# Altium PCB Main_conection.PcbDoc (part 1 of 3)
Units mm, origin at the board's own origin, x right, y up, seen from the top; angles counter-clockwise.
Board outline 75.25 x 97.25 mm, 4 copper layers (Top Layer, Layer 1, Layer 2, Bottom Layer), stack 1.57 mm thick; 186 components, 91 nets, 471 pads, 242 vias.
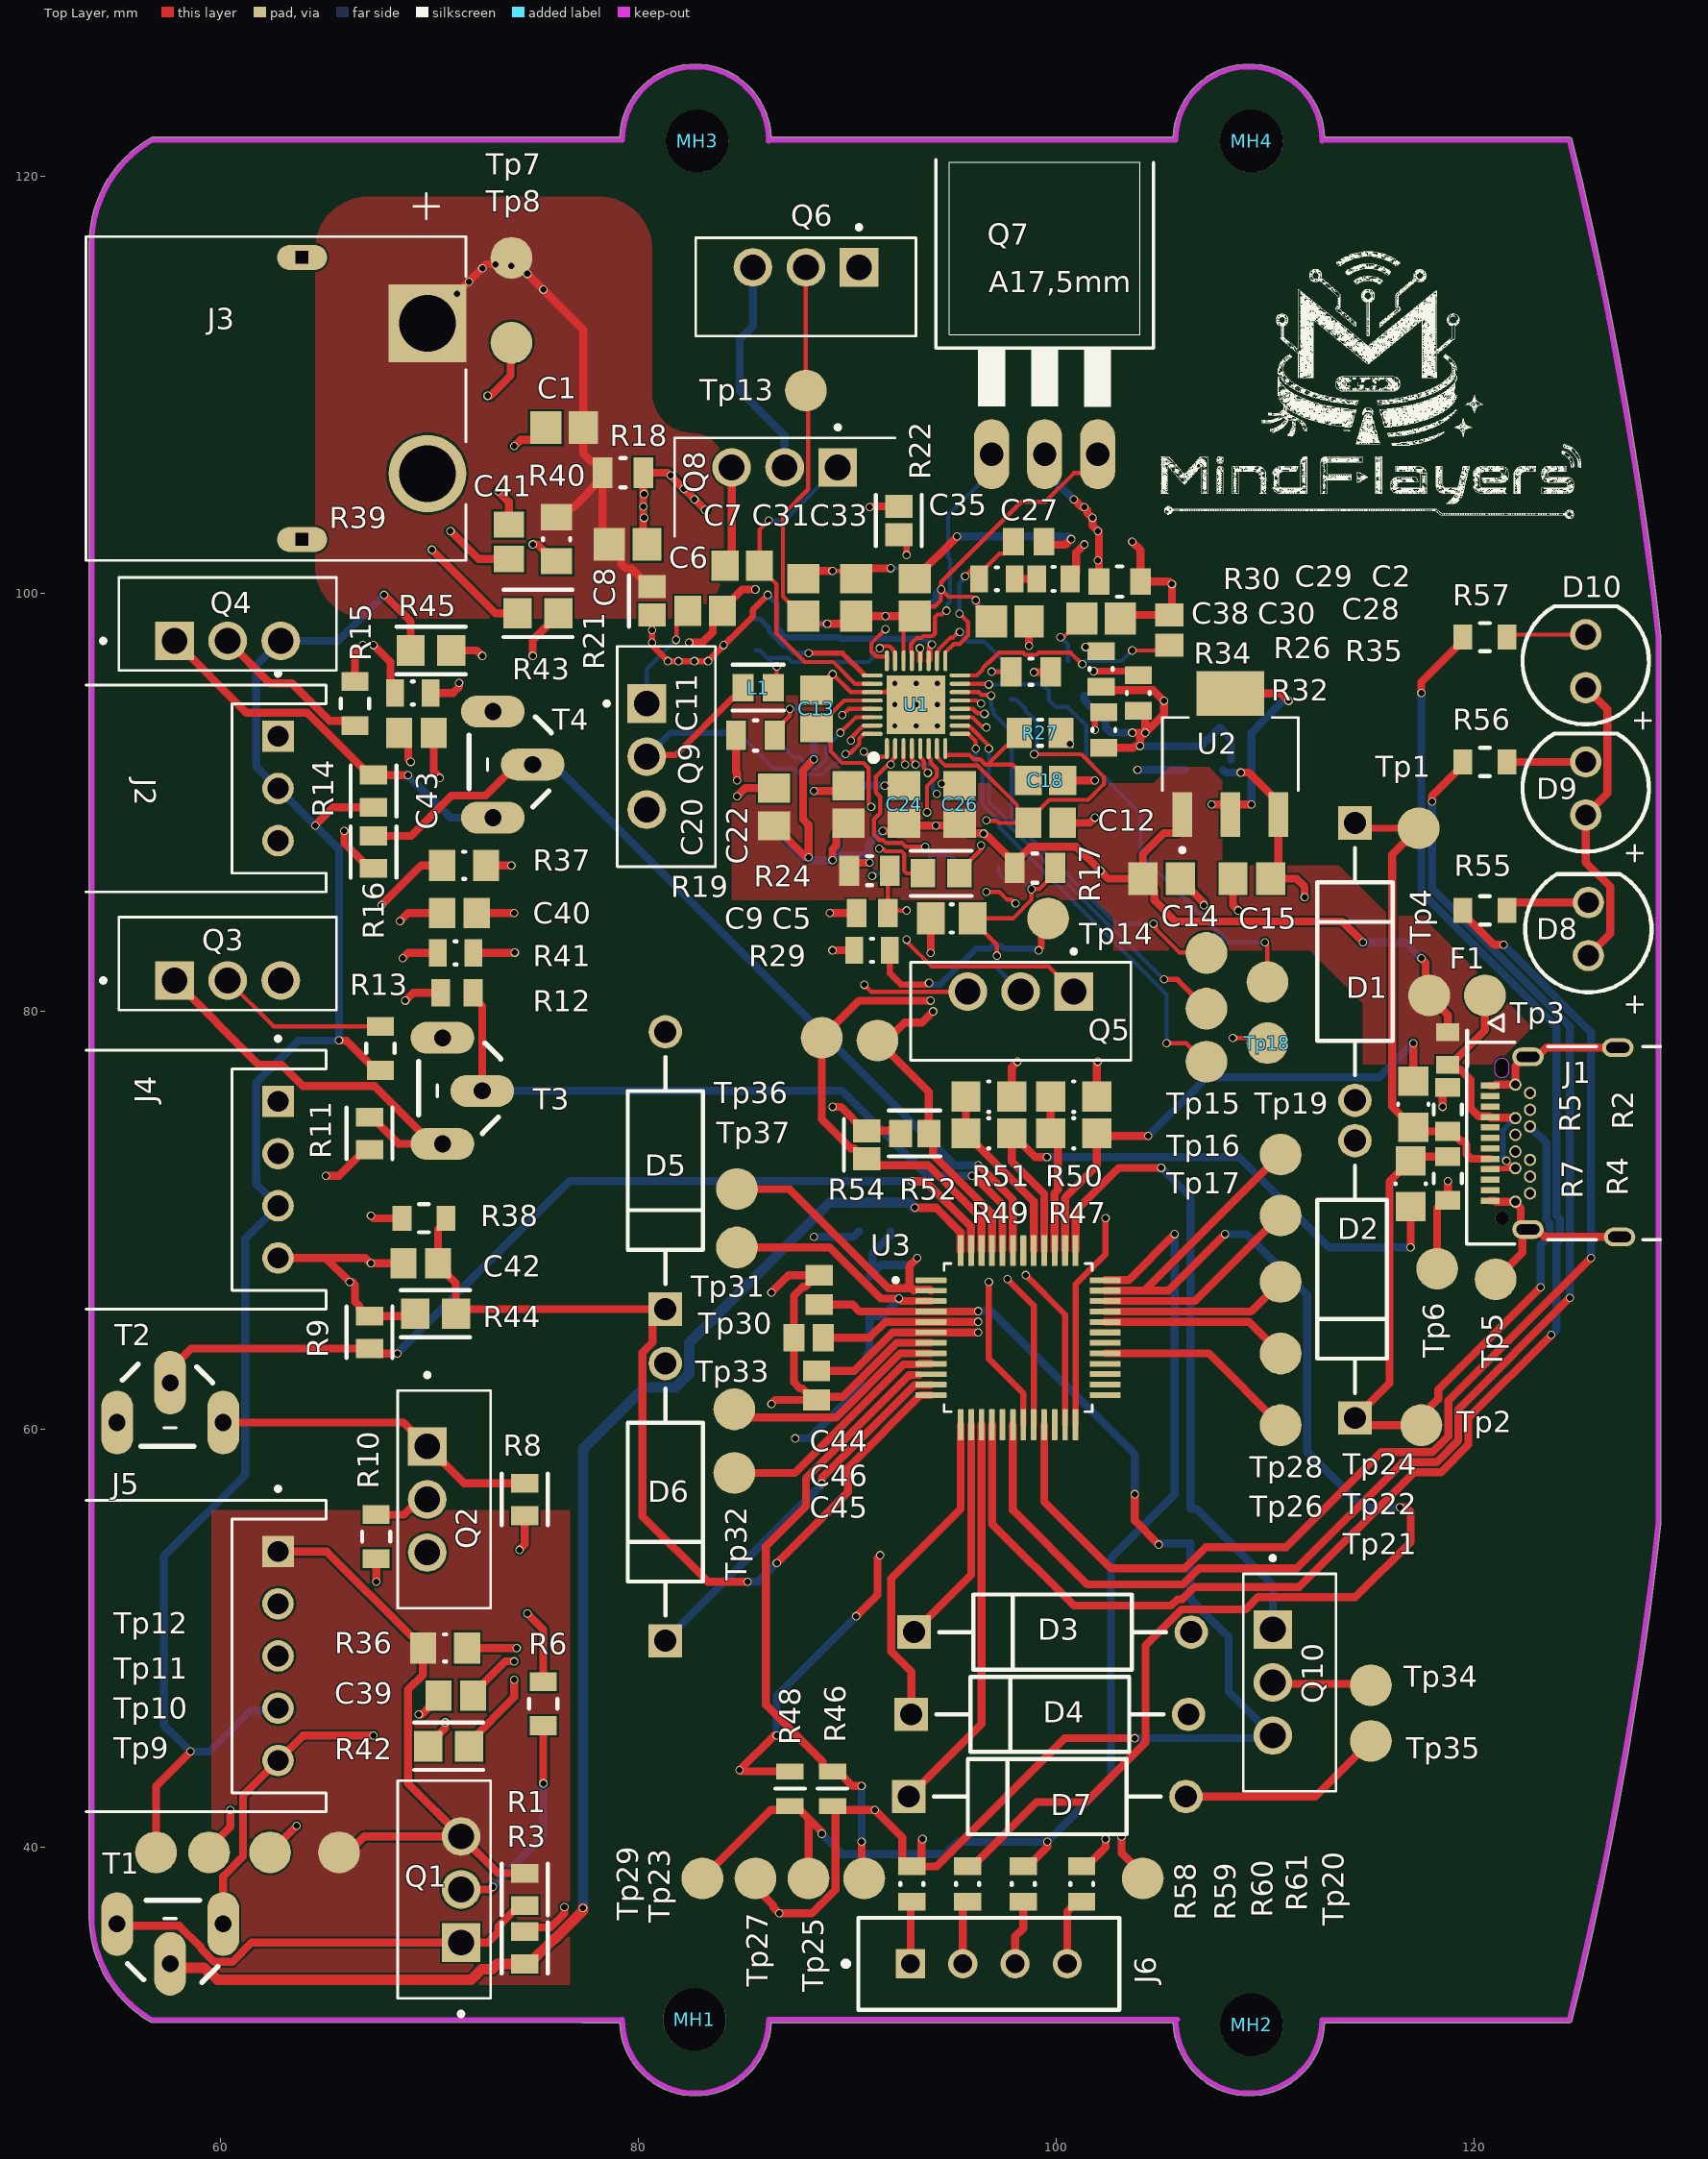
[diagram p0: Top Layer view]
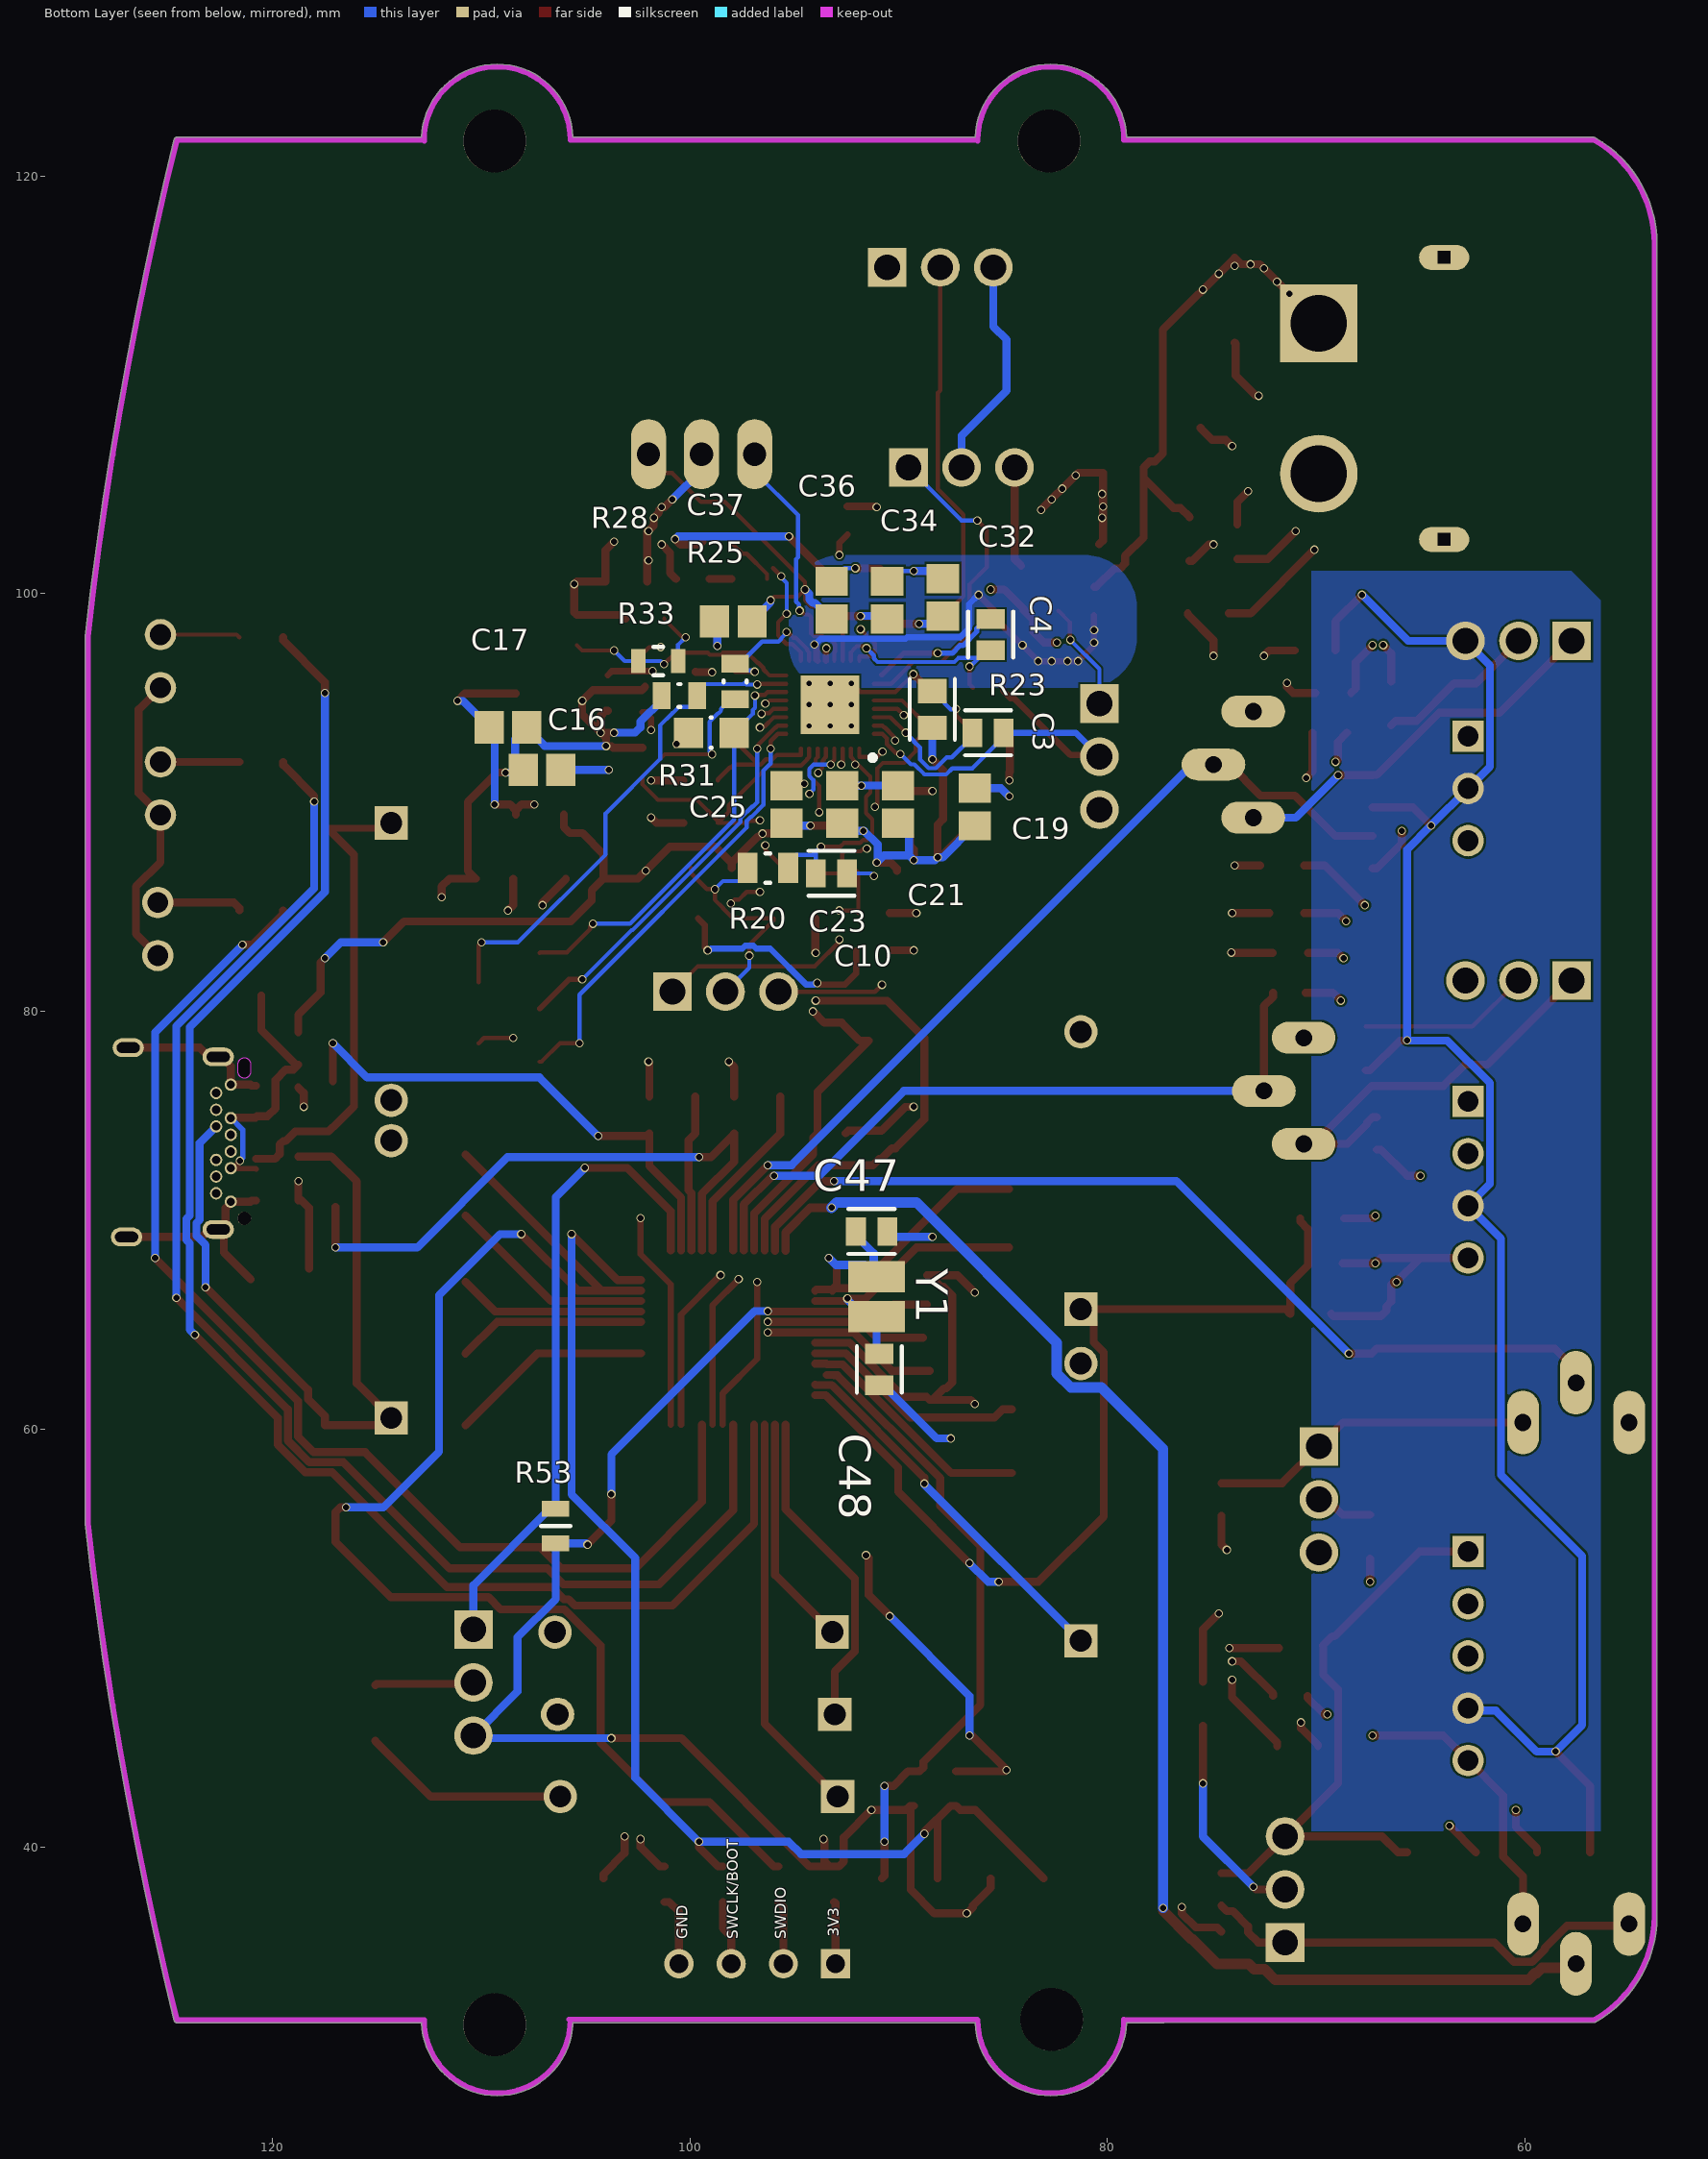
[diagram p1: Bottom Layer view, seen from below]
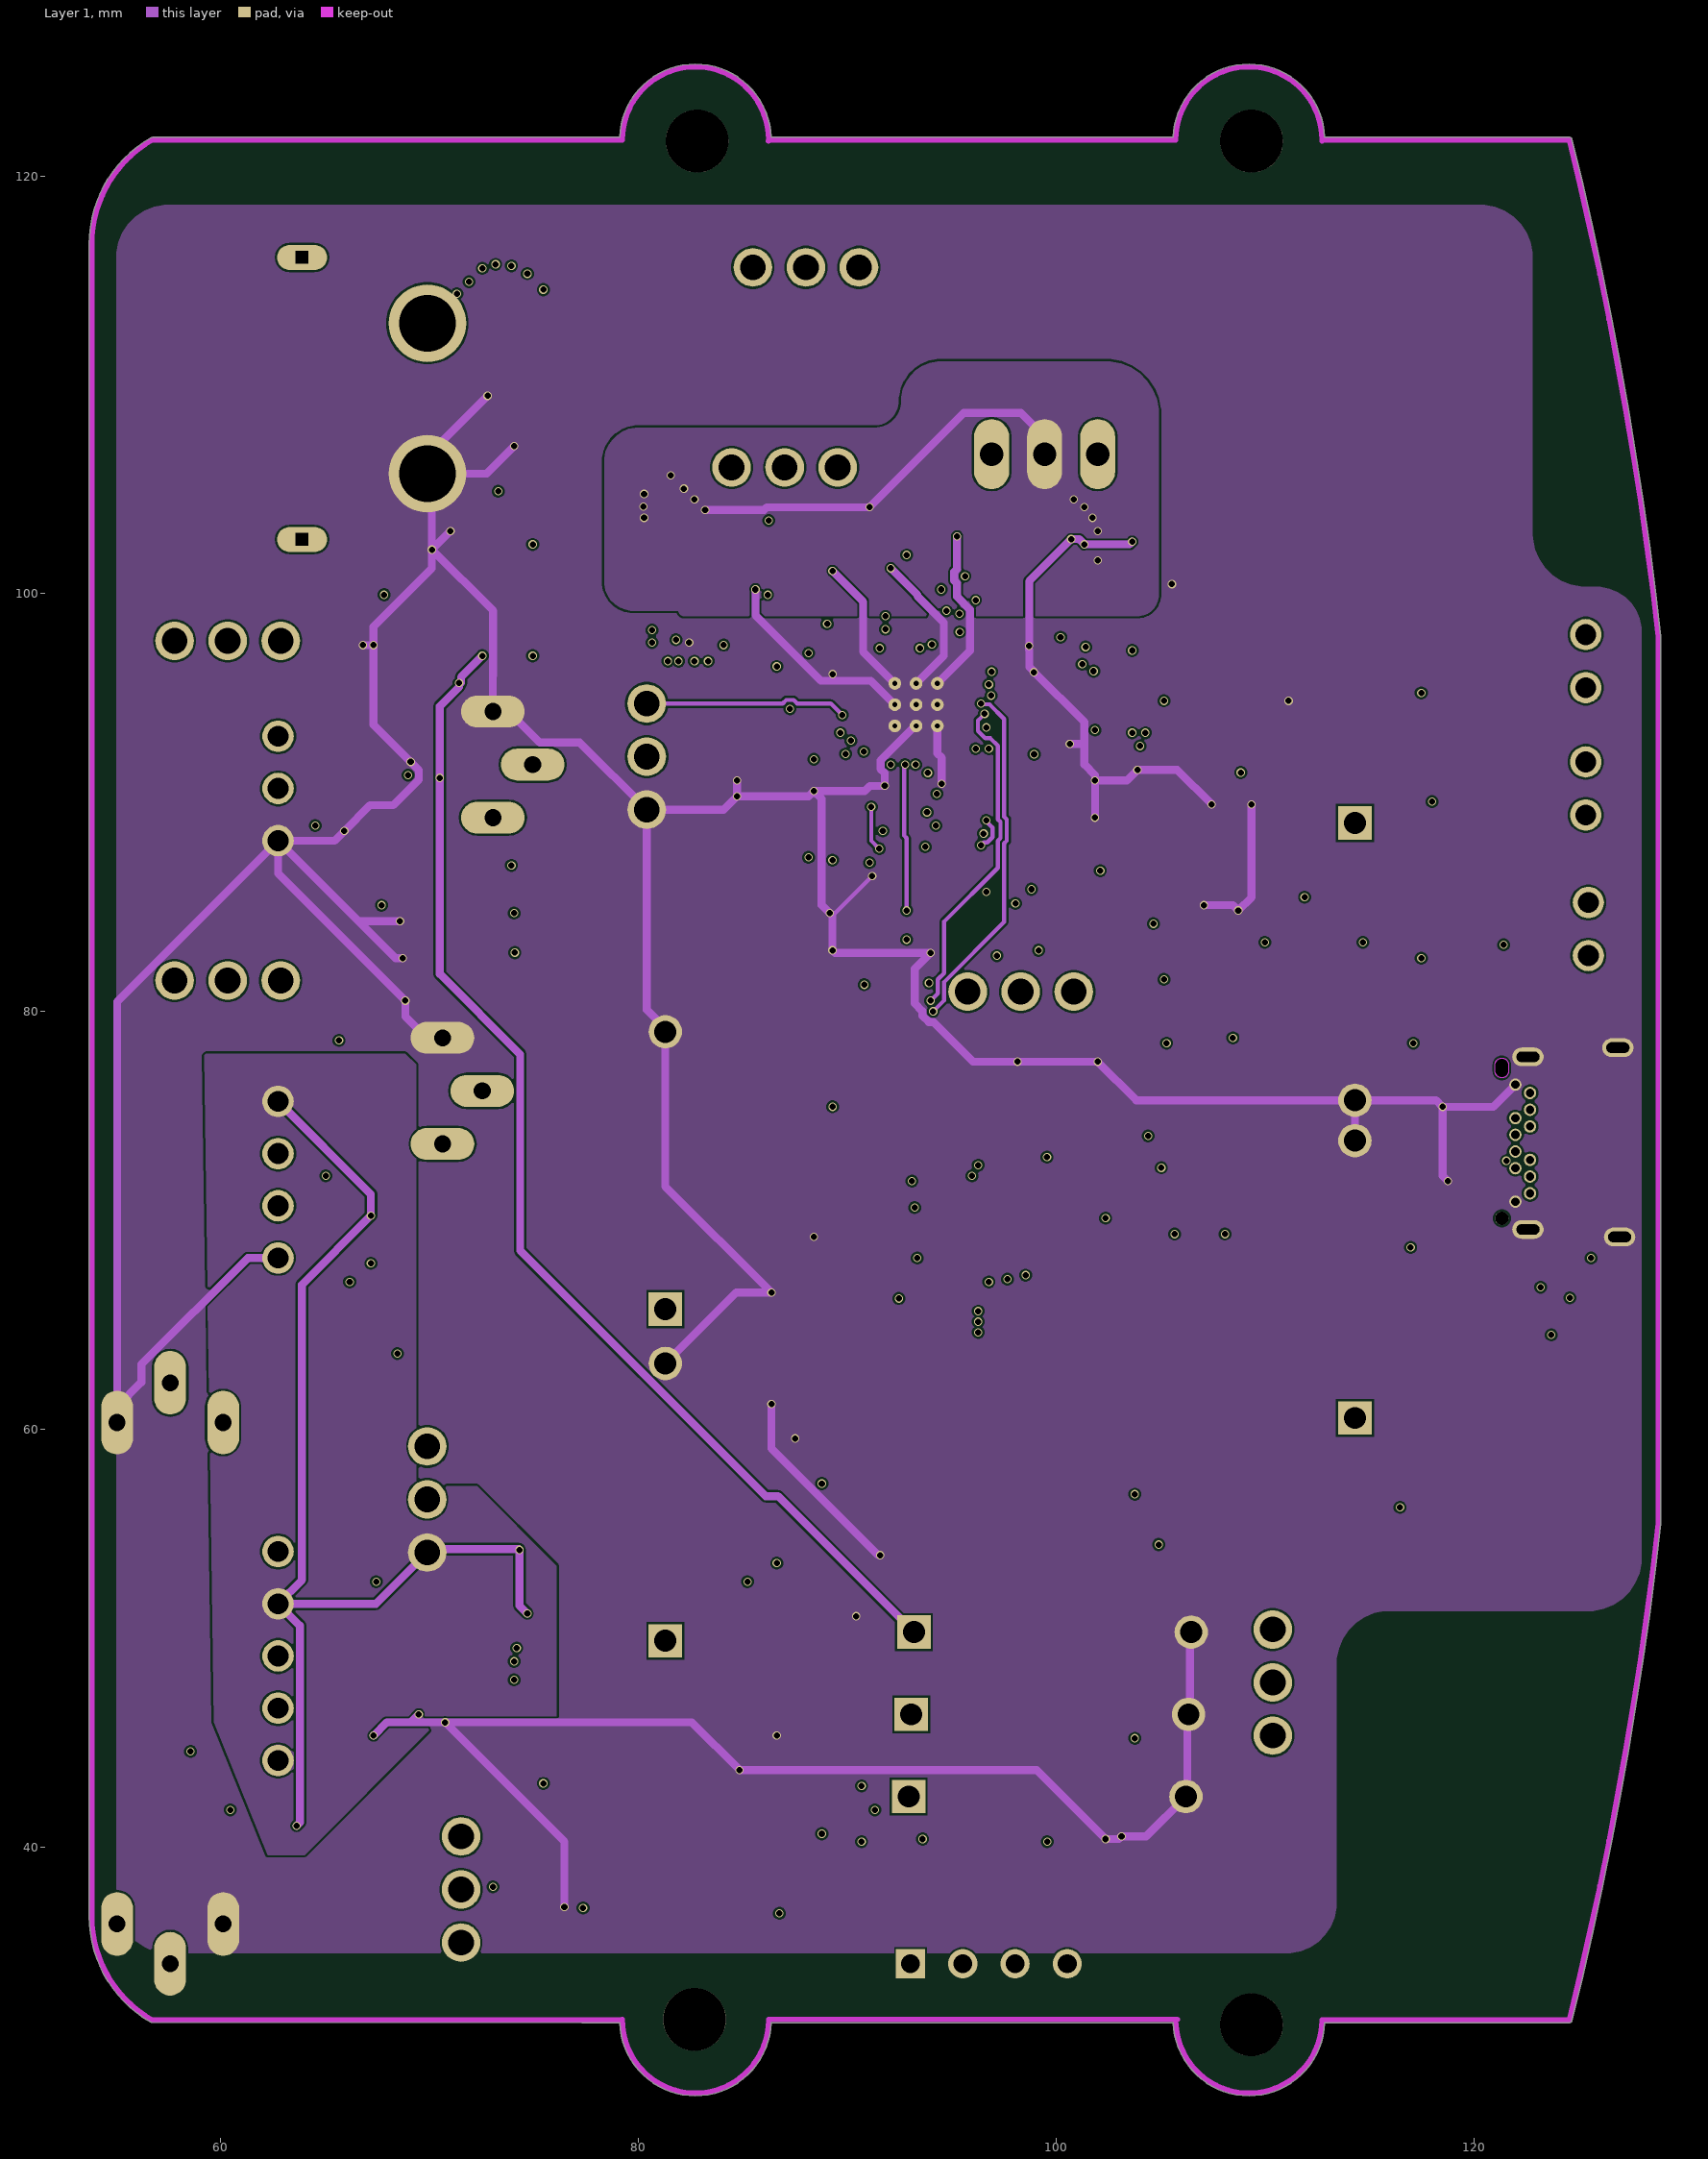
[diagram p2: Layer 1]
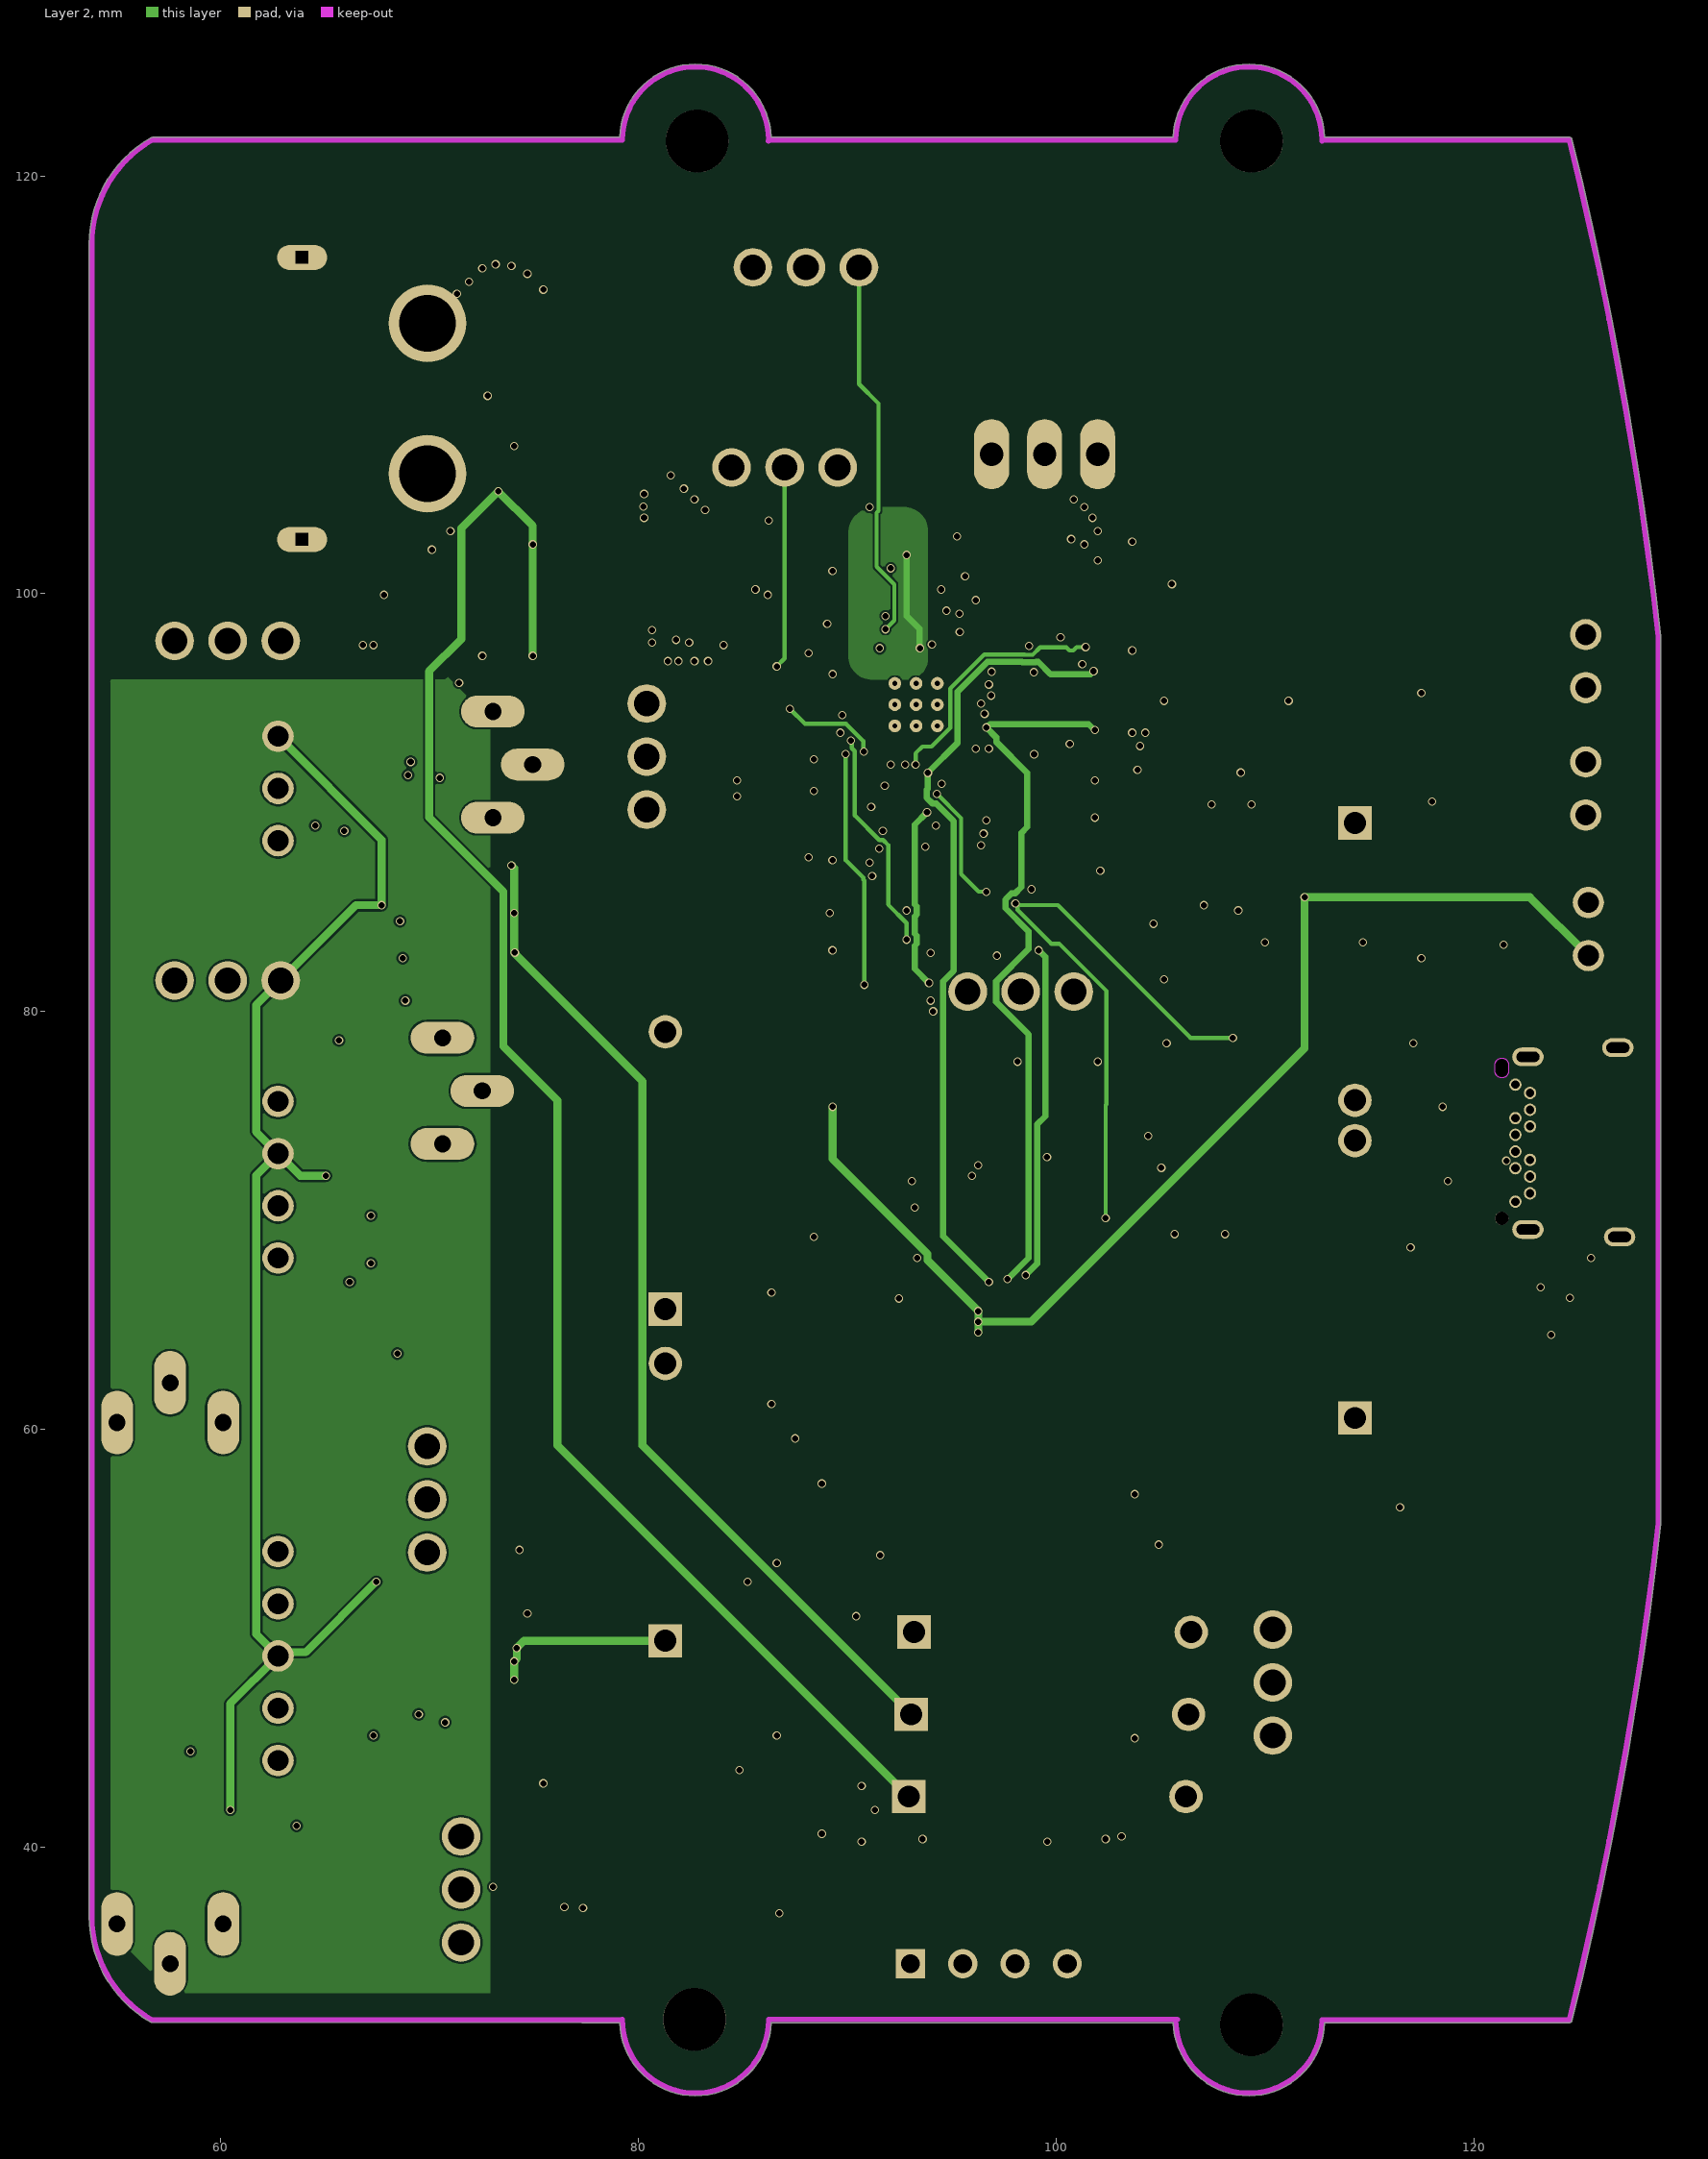
[diagram p3: Layer 2]
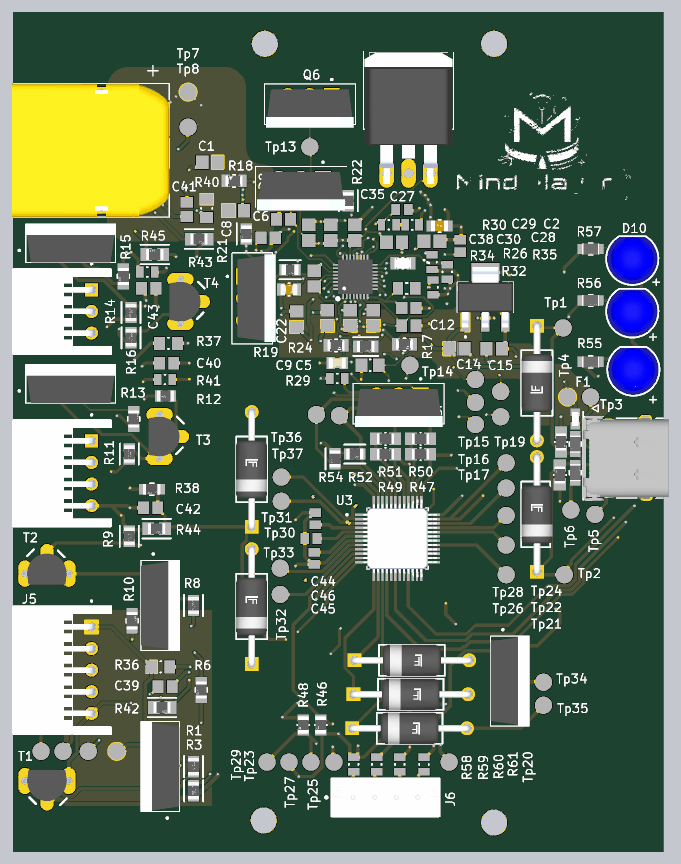
[diagram p5: 3D render of the assembled board from above, using the file's embedded part models]

## Layer stack, top to bottom
Top Solder: solder mask 0.0127, Solder Resist, Dk 3.8
Top Layer: signal copper 0.035
Dielectric 2: prepreg 0.2, 7628, Dk 4.6
Layer 1: signal copper 0.0175
Dielectric 1: dielectric 1.065, FR-4, Dk 4.5
Layer 2: signal copper 0.0175
Dielectric 3: prepreg 0.2, 7628, Dk 4.6
Bottom Layer: signal copper 0.035
Bottom Solder: solder mask 0.0127, Solder Resist, Dk 3.8

## Board outline
56.659,31.612 77.291,31.595 79.096,31.595 ccw(c82.721,31.722) 86.346,31.595 105.596,31.595 ccw(c109.221,31.722) 112.846,31.595 124.565,31.595 ccw(c124.565,31.722) 124.689,31.692 ccw(c-58.279,76.722) 128.948,55.483 128.949,55.498 128.949,97.947 128.948,97.961 ccw(c-58.279,76.722) 124.689,121.753 ccw(c124.565,121.722) 124.565,121.85 112.846,121.85 ccw(c109.221,121.722) 105.596,121.85 86.346,121.85 ccw(c82.721,121.722) 79.096,121.85 77.291,121.85 56.721,121.85 56.658,121.833 ccw(c59.566,116.732) 53.694,116.732 53.694,36.698 ccw(c59.54,36.698)

## Design rules (kind name [scope] priority, off if disabled: settings)
Clearance [All] p1: gap=0.1 ignorepadtopadclearanceinfootprint=FALSE
HoleSize [All] p1: absolutevalues=TRUE maxlimit=6.33 minlimit=0.025 maxpercent=80.000 minpercent=20.000
HoleToHoleClearance [All] p1: gap=0.2 allowstackedmicrovias=TRUE
MinimumSolderMaskSliver [All] p1: minsoldermaskwidth=0.1
PolygonConnect [All] p1: connectstyle=Direct reliefconductorwidth=0.254 reliefentries=4 polygonreliefangle="90 Angle" airgapwidth=0.254
RoutingVias [All] p1: holewidth=0.2 width=0.5 viastyle="Through Hole" minholewidth=0.15 minwidth=0.25 maxholewidth=0.15 maxwidth=0.25
SilkToSilkClearance [All] p1: silktosilkclearance=0.15
SilkToSolderMaskClearance [IsPad] p1: minsilkscreentomaskgap=0.15 clearancetoexposedcopper=TRUE
SolderMaskExpansion [All] p1: expansion=0.102 istentingtop=FALSE
SupplyNets "Schematic Supply Nets_4" [InNet('VBUS')] p1: voltage=0.000
SupplyNets "Schematic Supply Nets_3" [InNet('GND')] p2: voltage=0.000
SupplyNets "Schematic Supply Nets_2" [InNet('3.3V')] p3: voltage=0.000
SupplyNets "Schematic Supply Nets_1" [InNet('BAT')] p4: voltage=0.000
SupplyNets "Schematic Supply Nets" [InNet('VSYS')] p5: voltage=0.000
UnRoutedNet [All] p1: checkbadconnections=TRUE
Width [All] p1: maxlimit=1816.048 minlimit=0.102 preferedwidth=0.102
24 further rules are at their usual default settings.

## Classes and differential pairs
component class Main: MH1 MH2 MH3 MH4
component class U_Power: C1 C2 C3 C4 C5 C6 C7 C8 C9 C10 C11 C12 C13 C14 C15 C16 C17 C18 C19 C20 C21 C22 C23 C24 C25 C26 C27 C28 C29 C30 C31 C32 C33 C34 C35 C36 C37 C38 L1 Q5 Q6 Q7 Q8 Q9 R17 R18 R19 R20 R21 R22 R23 R24 R25 R26 R27 R28 R29 R30 R31 R32 R33 R34 R35 Tp13 Tp14 Tp15 Tp16 Tp17 Tp18 Tp19 U1 U2
component class U_Microcontroller: C39 C40 C41 C42 C43 C44 C45 C46 C47 C48 D3 D4 D5 D6 D7 D8 D9 D10 J6 Q10 R36 R37 R38 R39 R40 R41 R42 R43 R44 R45 R46 R47 R48 R49 R50 R51 R52 R53 R54 R55 R56 R57 R58 R59 R60 R61 Tp20 Tp21 Tp22 Tp23 Tp24 Tp25 Tp26 Tp27 Tp28 Tp29 Tp30 Tp31 Tp32 Tp33 Tp34 Tp35 Tp36 Tp37 U3 Y1
component class U_Connectors_U_B: D1 D2 F1 J1 J2 J3 J4 J5 Q1 Q2 Q3 Q4 R1 R2 R3 R4 R5 R6 R7 R8 R9 R10 R11 R12 R13 R14 R15 R16 T1 T2 T3 T4 Tp1 Tp2 Tp3 Tp4 Tp5 Tp6 Tp7 Tp8 Tp9 Tp10 Tp11 Tp12

## Components (designator, comment, footprint, x,y, rotation, side; value= is the part's Value field where it differs from the comment)
C1 "10uf 0805" CAPC2013X140X50ML20T25#1 76.454,107.95 r0 top
C2 "1uf 0805" FP-0805-L_2_01_0_2-W_1_25-MFG 103.038,100.584 r0 top
C3 "47nf 0805" FP-C0805C-DN-MFG 85.725,93.345 r0 bottom value="47,000 pF"
C4 "47nf 0805" FP-C0805C-DN-MFG 85.598,98.044 r90 bottom value="47,000 pF"
C5 "CAP 100nF 100V 0805(2012)" CAPC0805(2012)145_M 94.996,84.455 r0 top value=100nF
C6 "150pf" CAPC2013X145X48NL20T23 83.185,99.187 r180 top
C7 "150pf" CAPC2013X145X48NL20T23 84.963,101.346 r180 top
C8 "0.1uf 0805" CAPC2013X140X50ML20T25#1 79.502,102.362 r0 top
C9 "C0805C333J5JACTU" FP-C0805C-DN-MFG 91.186,84.709 r180 top value="33,000 pF"
C10 "C0805C333J5JACTU" FP-C0805C-DN-MFG 93.218,86.614 r180 bottom value="33,000 pF"
C11 "CC0805MKX5R8BB105" FP-CC0805-0_85-MFG 85.598,93.218 r180 top value="1 uF"
C12 "1uf 0805" CAPC2013X145X50NL20T20 99.482,89.027 r180 top
C13 "2.2uf 0805" CAPC2013X100X50ML20T25 88.519,94.488 r270 top
C14 "10uf 0805" CAPC2013X140X50ML20T25#2 105.04,86.36 r180 top
C15 "10uf 0805" CAPC2013X140X50ML20T25#2 109.358,86.36 r0 top
C16 "10uf 0805" CAPC2013X140X50ML20T25#2 107.072,91.567 r0 bottom
C17 "10uf 0805" CAPC2013X140X50ML20T25#2 108.712,93.599 r180 bottom
C18 "100pf 0805" CAPC2013X127X50NL20T25 99.482,91.059 r180 top
C19 "10uf 0805" CAPC2013X140X50ML20T25#2 86.36,89.789 r270 bottom
C20 "10uf 0805" CAPC2013X140X50ML20T25#2 86.487,89.789 r270 top
C21 "10uf 0805" CAPC2013X140X50ML20T25#2 90.043,89.916 r270 bottom
C22 "10uf 0805" CAPC2013X140X50ML20T25#2 90.043,89.916 r270 top
C23 "10uf 0805" CAPC2013X140X50ML20T25#2 92.71,89.916 r270 bottom
C24 "10uf 0805" CAPC2013X140X50ML20T25#2 92.71,89.916 r270 top
C25 "10uf 0805" CAPC2013X140X50ML20T25#2 95.377,89.916 r270 bottom
C26 "10uf 0805" CAPC2013X140X50ML20T25#2 95.377,89.916 r270 top
C27 "15pf 0805" CAPC2013X94X50LL20T25 98.679,102.489 r180 top
C28 "33pf 0805" CAPC2013X145X48LL20T23 105.41,98.261 r270 top
C29 "680pf 0805" CAPC0805(2012)145_L 99.863,100.711 r180 top value=680pF
C30 "1800pf 0805" CAPC2013X145X48ML20T23 102.149,98.806 r180 top
C31 "10uf 0805" CAPC2013X140X50ML20T25#3 87.884,99.822 r270 top
C32 "10uf 0805" CAPC2013X140X50ML20T25#2 87.884,99.822 r270 bottom
C33 "10uf 0805" CAPC2013X140X50ML20T25#3 90.424,99.822 r270 top
C34 "10uf 0805" CAPC2013X140X50ML20T25#2 90.551,99.695 r270 bottom
C35 "10uf 0805" CAPC2013X140X50ML20T25#3 93.218,99.822 r270 top
C36 "10uf 0805" CAPC2013X140X50ML20T25#2 93.218,99.695 r270 bottom
C37 "10uf 0805" CAPC2013X140X50ML20T25#2 97.917,98.679 r180 bottom
C38 "10uf 0805" CAPC2013X140X50ML20T25#3 97.79,98.679 r180 top
C39 "10uf 0805" CAPC2013X145X50NL20T20 71.247,47.244 r0 top
C40 "10uf 0805" CAPC2013X145X50NL20T20 71.422,84.709 r0 top
C41 "10uf 0805" CAPC2013X145X50NL20T20 73.787,102.489 r90 top
C42 "10uf 0805" CAPC2013X145X50NL20T20 69.575,67.945 r0 top
C43 "10uf 0805" CAPC2013X145X50NL20T20 69.362,93.345 r0 top
C44 "10uf" CAPC2013X145X50LL20T25 88.646,66.675 r270 top
C45 "10uf" CAPC2013X145X50LL20T25 88.519,62.103 r90 top
C46 "10uf" CAPC2013X145X50LL20T25 88.138,64.389 r0 top
C47 "C0805C100J3HACTU" FP-C0805C-DN-MFG 91.301,69.469 r180 bottom value="10 pF"
C48 "C0805C100J3HACTU" FP-C0805C-DN-MFG 90.932,62.865 r270 bottom value="10 pF"
D1 "P6KE6.8A" FP-P6KE-MFG 114.3,82.389 r270 top
D2 "P6KE6.8A" FP-P6KE-MFG 114.3,67.183 r90 top
D3 "P6KE6.8A" FP-P6KE-MFG 99.822,50.292 r0 top
D4 "P6KE6.8A" FP-P6KE-MFG 99.695,46.355 r0 top
D5 "P6KE6.8A" FP-P6KE-MFG 81.28,72.39 r90 top
D6 "P6KE6.8A" FP-P6KE-MFG 81.28,56.515 r90 top
D7 "P6KE6.8A" FP-P6KE-MFG 99.568,42.418 r0 top
D8 "15400594F3590" WL-TIRC_5mm 125.476,83.947 r90 top
D9 "15400594F3590" WL-TIRC_5mm 125.349,90.678 r90 top
D10 "15400594F3590" WL-TIRC_5mm 125.349,96.774 r90 top
F1 "F0603G0R05FNTR" FP-F0603G-MFG 118.745,78.232 r270 top value=3.4Ω
J1 "2171830001" MOLEX_2171830001 128.922,73.698 r90 top locked
J2 "S3B-XH-A" JST_S3B-XH-A 57.038,90.678 r270 top
J3 "XT60PW-M" AMASS_XT60PW-M 63.888,109.347 r270 top
J4 "S4B-XH-A" JST_S4B-XH-A 57.038,71.949 r270 top
J5 "S5B-XH-A" JST_S5B-XH-A 57.038,49.149 r270 top
J6 "B4B-EH-TS(LF)(SN)" FP-B4B-EH-TS_LF_SN-MFG 96.774,34.417 r0 top
L1 "LQM21PN2R2MCHD" FP-LQM21PN_CH-IPC_C 85.725,95.504 r0 top
MH1 "MH" MH 82.677,31.75 r0 top
MH2 "MH" MH 109.347,31.496 r0 top
MH3 "MH" MH 82.804,121.666 r0 top
MH4 "MH" MH 109.347,121.666 r0 top
Q1 "IRF9540N Q6" TO254P1041X444X1930-3 70.691,37.973 r90 top
Q2 "IRF9540N Q6" TO254P1041X444X1930-3 70.691,56.642 r270 top
Q3 "IRF9540N Q6" TO254P1041X444X1930-3 60.325,82.296 r0 top
Q4 "IRF9540N Q6" TO254P1041X444X1930-3 60.325,98.552 r0 top
Q5 "IRLZ44N" TO254P1054X469X1930-3 98.298,80.01 r180 top
Q6 "IRLZ44N" TO254P1054X469X1930-3 88.011,114.681 r180 top
Q7 "IRF4905" TO220BH 99.441,113.03 r0 top
Q8 "IRLZ44N" TO254P1054X469X1930-3 86.995,105.105 r180 top
Q9 "IRLZ44N" TO254P1054X469X1930-3 81.331,92.202 r270 top
Q10 "IRF9540N Q6" TO254P1041X444X1930-3 111.173,47.879 r270 top
R1 "CRGCQ0805J10K" FP-CRGCQ0805-IPC_C 74.549,37.973 r90 top value=10KΩ
R2 "0" FP-HCJ0805-MFG 117.094,75.565 r270 top
R3 "CRGCQ0805J10K" FP-CRGCQ0805-IPC_C 74.549,35.179 r270 top value=10KΩ
R4 "0" FP-HCJ0805-MFG 116.967,71.755 r90 top
R5 "AC0805JR-075K1L" FP-AC0805-MFG 118.745,75.311 r270 top value=5.1KΩ
R6 "RMCF0805JG47R0" FP-RMCF0805-MFG 75.438,46.863 r270 top
R7 "AC0805JR-075K1L" FP-AC0805-MFG 118.745,72.009 r90 top value=5.1KΩ
R8 "CRGCQ0805J10K" FP-CRGCQ0805-IPC_C 74.549,56.642 r270 top value=10KΩ
R9 "CRGCQ0805J10K" FP-CRGCQ0805-IPC_C 67.112,64.643 r270 top value=10KΩ
R10 "RMCF0805JG47R0" FP-RMCF0805-MFG 67.437,54.864 r90 top
R11 "CRGCQ0805J10K" FP-CRGCQ0805-IPC_C 67.112,74.168 r270 top value=10KΩ
R12 "CRGCQ0805J10K" FP-CRGCQ0805-IPC_C 71.3,80.899 r0 top value=10KΩ
R13 "RMCF0805JG47R0" FP-RMCF0805-MFG 67.635,78.232 r90 top
R14 "CRGCQ0805J10K" FP-CRGCQ0805-IPC_C 67.31,90.551 r270 top value=10KΩ
R15 "RMCF0805JG47R0" FP-RMCF0805-MFG 66.421,94.742 r270 top
R16 "CRGCQ0805J10K" FP-CRGCQ0805-IPC_C 67.31,87.63 r90 top value=10KΩ
R17 "0.01ohm C46634450" FP-CRCW0805-HPe3-MFG 98.974,86.868 r180 top
R18 "0.01ohm C46634450" FP-CRCW0805-HPe3-MFG 79.248,105.791 r0 top
R19 "4.99ohm 0805" FP-CRCW0805-HPe3-MFG 91.059,86.741 r180 top
R20 "4.99ohm 0805" FP-CRCW0805-HPe3-MFG 96.266,86.868 r0 bottom
R21 "RNCP0805FTD10R0" FP-RNCP0805-IPC_C 80.645,99.654 r90 top
R22 "RNCP0805FTD10R0" FP-RNCP0805-IPC_C 92.456,103.505 r90 top
R23 "RMCF0805FG10R0" FP-RMCF0805-IPC_B 88.392,94.464 r270 bottom
R24 "10ohm 0805" FP-RMCF0805-IPC_B 94.488,86.614 r0 top
R25 "10K 5% 0805(2012)" RESC0805(2012)_L 97.831,95.797 r270 bottom value="10000.00 Ohm"
R26 "CRCW0805402KFKEC" FP-CRCW0805-e3-IPC_B 98.782,96.266 r180 top
R27 "137k 0805" RESC2013X60X35ML10T20 99.228,93.345 r180 top
R28 "40.2k 0805" FP-ESR10-MFG 101.514,96.774 r0 bottom
R29 "10K 5% 0805" RESC0805(2012)_L 91.186,82.931 r0 top value="10000.00 Ohm"
R30 "10K 5% 0805" RESC0805(2012)_L 97.155,100.711 r180 top value="10000.00 Ohm"
R31 "0 ohm 0805" FP-HCJ0805-MFG 98.974,93.345 r180 bottom
R32 "10K 5% 0805" RESC0805(2012)_L 102.276,93.472 r270 top value="10000.00 Ohm"
R33 "10K 5% 0805" RESC0805(2012)_L 100.496,95.123 r0 bottom value="10000.00 Ohm"
R34 "10K 5% 0805" RESC0805(2012)_L 103.927,95.25 r270 top value="10000.00 Ohm"
R35 "10K 5% 0805" RESC0805(2012)_L 102.149,96.393 r270 top value="10000.00 Ohm"
R36 "5K36 1% 0805" RESC0805(2012)_M 70.739,49.53 r180 top value="5360.00 Ohm"
R37 "5K36 1% 0805" RESC0805(2012)_M 71.647,86.995 r180 top value="5360.00 Ohm"
R38 "3.57k 0805" FP-RT0805-MFG 69.723,70.104 r180 top value=357KΩ
R39 "1.2k 0805" FP-RMCF0805-IPC_A 70.064,97.282 r180 top
R40 "5K36 1% 0805" RESC0805(2012)_M 76.073,102.616 r90 top value="5360.00 Ohm"
R41 "3.6k 0805" RESC0805(2012)_L 71.247,82.804 r0 top value="3600.00 Ohm"
R42 "1.2k 0805" FP-RMCF0805-IPC_A 70.906,44.831 r0 top
R43 "1.2k 0805" FP-RMCF0805-IPC_A 75.184,99.06 r0 top
R44 "1.2k 0805" FP-RMCF0805-IPC_A 70.276,65.532 r0 top
R45 "3.6k 0805" RESC0805(2012)_L 69.187,95.25 r0 top value="3600.00 Ohm"
R46 "10k ohm 0805" FP-MCU0805-IPC_C 89.281,42.799 r270 top
R47 "0" FP-HCJ0805-MFG 100.838,74.168 r0 top
R48 "10k ohm 0805" FP-MCU0805-IPC_C 87.249,42.799 r270 top
R49 "0" FP-HCJ0805-MFG 96.774,74.168 r0 top
R50 "0" FP-HCJ0805-MFG 100.838,75.925 r180 top
R51 "0" FP-HCJ0805-MFG 96.774,75.925 r180 top
R52 "RNCP0805FTD12K4" FP-RNCP0805-IPC_C 93.218,74.168 r180 top
R53 "10k ohm 0805" FP-MCU0805-IPC_C 106.426,55.372 r270 bottom
R54 "RNCP0805FTD12K4" FP-RNCP0805-IPC_C 90.932,73.619 r90 top
R55 "AC0805FR-07220RL" FP-AC0805-MFG 120.523,84.836 r0 top value=220Ω
R56 "AC0805FR-07220RL" FP-AC0805-MFG 120.523,91.948 r0 top value=220Ω
R57 "AC0805FR-07220RL" FP-AC0805-MFG 120.523,97.917 r0 top value=220Ω
R58 "10K 5% 0805(2012)" RESC0805(2012)_L 93.091,38.227 r90 top value="10000.00 Ohm"
R59 "10K 5% 0805(2012)" RESC0805(2012)_L 95.758,38.227 r90 top value="10000.00 Ohm"
R60 "10K 5% 0805(2012)" RESC0805(2012)_L 98.425,38.227 r90 top value="10000.00 Ohm"
R61 "10K 5% 0805(2012)" RESC0805(2012)_L 101.219,38.227 r270 top value="10000.00 Ohm"
T1 "2N7000" TO92 57.572,36.322 r180 top
T2 "2N7000" TO92 57.572,60.325 r0 top
T3 "2N7000" TO92 70.612,76.2 r270 top
T4 "2N7000" TO92 73.025,91.821 r270 top
Tp1 "TP" TP 117.348,88.773 r0 top
Tp2 "TP" TP 117.475,60.198 r0 top
Tp3 "TP" TP 120.523,80.772 r0 top
Tp4 "TP" TP 117.856,80.772 r0 top
Tp5 "TP" TP 121.031,67.183 r0 top
Tp6 "TP" TP 118.237,67.691 r0 top
Tp7 "TP" TP 73.914,116.078 r0 top
Tp8 "TP" TP 73.914,112.014 r0 top
Tp9 "TP" TP 65.659,39.751 r0 top
Tp10 "TP" TP 62.357,39.751 r90 top
Tp11 "TP" TP 59.436,39.751 r90 top
Tp12 "TP" TP 56.896,39.751 r90 top
Tp13 "TP" TP 88.011,109.728 r90 top
Tp14 "TP" TP 99.609,84.455 r90 top
Tp15 "TP" TP 107.188,82.804 r90 top
Tp16 "TP" TP 107.188,80.137 r90 top
Tp17 "TP" TP 107.188,77.597 r90 top
Tp18 "TP" TP 110.109,78.486 r90 top
Tp19 "TP" TP 110.109,81.407 r90 top
Tp20 "TP" TP 104.14,38.502 r90 top
Tp21 "TP" TP 110.744,60.198 r90 top
Tp22 "TP" TP 110.744,63.627 r90 top
Tp23 "TP" TP 90.805,38.502 r90 top
Tp24 "TP" TP 110.744,67.056 r90 top
Tp25 "TP" TP 88.138,38.502 r90 top
Tp26 "TP" TP 110.744,70.231 r90 top
Tp27 "TP" TP 85.598,38.502 r90 top
Tp28 "TP" TP 110.744,73.152 r90 top
Tp29 "TP" TP 83.058,38.502 r90 top
Tp30 "TP" TP 84.709,68.707 r90 top
Tp31 "TP" TP 84.709,71.501 r90 top
Tp32 "TP" TP 84.582,57.912 r90 top
Tp33 "TP" TP 84.582,60.96 r90 top
Tp34 "TP" TP 115.062,47.752 r90 top
Tp35 "TP" TP 115.062,45.085 r90 top
Tp36 "TP" TP 88.773,78.74 r90 top
Tp37 "TP" TP 91.44,78.613 r90 top
U1 "BQ25703ARSNR" BQ25703A_QFN-32 93.286,94.688 r90 top
U2 "LM2936MP-5.0" SOT230P700X180-4N 108.331,92.329 r90 top
U3 "STM32G071CBT6" QFP50P900X900X160-48N 98.171,64.389 r0 top
Y1 "NX3225GD-8MHZ-STD-CRA-3" NDK-NX3225GD-8MHZ-STD-CRA-3_V 91.059,66.355 r90 bottom

## Footprints (in the part's own frame and the unit in brackets; to place one, negate y for a bottom-side part, rotate by r counter-clockwise, add the part's x,y. Pads: shape width x height; smd on the part's side, far side on the other; paste and mask are expansions set on the pad)
AMASS_XT60PW-M [mm]
  rect 3.716x3.716 / inner round 3.716 / far side rect 3.716x3.716 hole 2.7 mask+0.102: 1(-3.6,6)
  round 3.716 hole 2.7 mask+0.102: 2(3.6,6)
  oval 1.2x2.4 hole 0.6 square mask+0.102: SH1(-6.75,0) SH2(6.75,0)
  silkscreen extent -9.8,-10.35 7.75,7.85, body extent -7.75,-10.35 7.75,7.85, height 8.4
BQ25703A_QFN-32 [mm]
  oval 1x0.2 smd paste+0 mask+0: 1(-2.1,1.4) 2(-2.1,1) 3(-2.1,0.6) 4(-2.1,0.2) 5(-2.1,-0.2) 6(-2.1,-0.6) 7(-2.1,-1) 8(-2.1,-1.4) 17(2.1,-1.4) 18(2.1,-1) 19(2.1,-0.6) 20(2.1,-0.2) 21(2.1,0.2) 22(2.1,0.6) 23(2.1,1) 24(2.1,1.4)
  oval 0.2x1 smd paste+0 mask+0: 9(-1.4,-2.1) 10(-1,-2.1) 11(-0.6,-2.1) 12(-0.2,-2.1) 13(0.2,-2.1) 14(0.6,-2.1) 15(1,-2.1) 16(1.4,-2.1) 25(1.4,2.1) 26(1,2.1) 27(0.6,2.1) 28(0.2,2.1) 29(-0.2,2.1) 30(-0.6,2.1) 31(-1,2.1) 32(-1.4,2.1)
  rect 2.8x2.8 smd paste-2 mask+0.05: GND(0,0)
  rect 2.8x2.8 smd far side paste-2 mask+0: GND1(0,0)
  round 0.61 hole 0.25 mask+0: P$1(-1.016,1.016) P$2(0,1.016) P$3(1.016,1.016) P$4(-1.016,-1.016) P$5(1.016,-1.016) P$6(0,-1.016) P$7(0,0) P$8(1.016,0) P$9(-1.016,0)
  silkscreen extent -2.64,1.93 -2.44,2.13, body extent -2,-2 2,2, height 0.8
CAPC0805(2012)145_L [mm] "Chip Capacitor, Body 2.0x1.2mm, Height 1.45mm, IPC High Density"
  rect 0.9x1.3 smd: 1(-0.8,0) 2(0.8,0)
  silkscreen extent -0.05,-0.58 0.05,0.58, body extent -1.1,-0.72 1.1,0.72, height 1.45
CAPC0805(2012)145_M [mm] "Chip Capacitor, Body 2.0x1.2mm, Height 1.45mm, IPC Low Density"
  rect 1.35x1.55 smd: 1(-1,0) 2(1,0)
  silkscreen extent -0.05,-0.67 0.05,0.67, body extent -1.1,-0.72 1.1,0.72, height 1.45
CAPC2013X94X50LL20T25 [mm] "Chip Capacitor, 2-Leads, Body 2.01x1.25mm, IPC High Density"
  rect 1x1.3 smd: 1(-0.725,0) 2(0.725,0)
  body extent -1.1,-0.72 1.1,0.72, height 0.94
CAPC2013X100X50ML20T25 [mm] "Chip Capacitor, 2-Leads, Body 2.00x1.25mm, IPC Low Density"
  rect 1.4x1.55 smd: 1(-0.9,0) 2(0.9,0)
  body extent -1.1,-0.72 1.1,0.72, height 1
CAPC2013X127X50NL20T25 [mm] "Chip Capacitor, 2-Leads, Body 2.01x1.25mm, IPC Medium Density"
  rect 1.3x1.4 smd: 1(-0.825,0) 2(0.825,0)
  body extent -1.1,-0.72 1.11,0.72, height 1.27
CAPC2013X140X50ML20T25#1 [mm] "Chip Capacitor, 2-Leads, Body 2.00x1.25mm, IPC Low Density"
  rect 1.5x1.55 smd: 1(-0.9,0)
  rect 1.4x1.55 smd: 2(0.9,0)
  body extent -1.1,-0.72 1.1,0.72, height 1.4
CAPC2013X140X50ML20T25#2 [mm] "Chip Capacitor, 2-Leads, Body 2.00x1.25mm, IPC Low Density"
  rect 1.4x1.55 smd: 1(-0.9,0) 2(0.9,0)
  body extent -1.1,-0.72 1.1,0.72, height 1.4
CAPC2013X140X50ML20T25#3 [mm] "Chip Capacitor, 2-Leads, Body 2.00x1.25mm, IPC Low Density"
  rect 1.4x1.55 smd: 1(-0.9,0)
  rect 1.5x1.55 smd: 2(0.9,0)
  body extent -1.1,-0.72 1.1,0.72, height 1.4
CAPC2013X145X48LL20T23 [mm] "Chip Capacitor, 2-Leads, Body 2.00x1.25mm, IPC High Density"
  rect 1.1x1.35 smd: 1(-0.725,0) 2(0.725,0)
  body extent -1.1,-0.72 1.1,0.72, height 1.45
CAPC2013X145X48ML20T23 [mm] "Chip Capacitor, 2-Leads, Body 2.00x1.25mm, IPC Low Density"
  rect 1.5x1.55 smd: 1(-0.925,0) 2(0.925,0)
  body extent -1.1,-0.72 1.1,0.72, height 1.45
CAPC2013X145X48NL20T23 [mm] "Chip Capacitor, 2-Leads, Body 2.00x1.25mm, IPC Medium Density"
  rect 1.3x1.45 smd: 1(-0.825,0) 2(0.825,0)
  body extent -1.1,-0.72 1.1,0.72, height 1.45
CAPC2013X145X50LL20T25 [mm] "Chip Capacitor, 2-Leads, Body 2.00x1.25mm, IPC High Density"
  rect 1x1.3 smd: 1(-0.7,0) 2(0.7,0)
  body extent -1.1,-0.72 1.1,0.72, height 1.45
CAPC2013X145X50NL20T20 [mm] "Chip Capacitor, 2-Leads, Body 2.00x1.25mm, IPC Medium Density"
  rect 1.25x1.45 smd: 1(-0.825,0) 2(0.825,0)
  body extent -1.1,-0.72 1.1,0.72, height 1.45
FP-0805-L_2_01_0_2-W_1_25-MFG [mm]
  rect 1x1.25 smd paste+0 mask+0: 1(-1,0) 2(1,0)
  silkscreen extent -0.13,-0.72 0.13,0.72, body extent -1.6,-0.82 1.6,0.82, height 0.25
FP-AC0805-MFG [mm]
  rect 0.9x1.2 smd paste+0 mask+0: 1(-1.05,0) 2(1.05,0)
  silkscreen extent -0.23,-0.67 0.23,0.67, body extent -1.6,-0.77 1.6,0.77, height 0.25
FP-B4B-EH-TS_LF_SN-MFG [mm]
  rect 1.4x1.4 hole 0.9 paste-2539.97 mask+0: 1(-3.75,0)
  round 1.4 hole 0.9 paste-2539.97 mask+0: 2(-1.25,0) 3(1.25,0) 4(3.75,0)
  silkscreen extent -6.97,-2.2 6.25,2.2, body extent -6.35,-2.3 6.35,2.3, height 0.25
FP-C0805C-DN-MFG [mm]
  rect 0.95x1.35 smd paste+0 mask+0: 1(-0.75,0) 2(0.75,0)
  silkscreen extent -1.1,-1.07 1.1,1.07, body extent -1,-0.63 1,0.63, height 0.88
FP-CC0805-0_85-MFG [mm]
  rect 0.95x1.4 smd paste+0 mask+0: 1(-0.925,0) 2(0.925,0)
  silkscreen extent -0.08,-0.72 0.08,0.72, body extent -1.6,-1.05 1.6,1.05, height 0.25
FP-CRCW0805-e3-IPC_B [mm]
  rect 1.007x1.408 smd paste+0 mask+0: 1(-0.951,0) 2(0.951,0)
  silkscreen extent -0.07,-0.63 0.07,0.63, body extent -1.7,-0.95 1.7,0.95, height 0.25
FP-CRCW0805-HPe3-MFG [mm]
  rect 0.95x1.45 smd paste+0 mask+0: 1(-0.975,0) 2(0.975,0)
  silkscreen extent -0.13,-0.7 0.13,0.7, body extent -1.55,-0.82 1.55,0.82, height 0.25
FP-CRGCQ0805-IPC_C [mm]
  rect 0.906x1.31 smd paste+0 mask+0: 1(-0.776,0) 2(0.776,0)
  silkscreen extent -1.23,-1.1 1.23,1.1, body extent -1.33,-0.8 1.33,0.8, height 0.25
FP-ESR10-MFG [mm]
  rect 0.7x1.15 smd paste+0 mask+0: 1(-0.95,0) 2(0.95,0)
  silkscreen extent -0.22,-0.67 0.22,0.67, body extent -1,-0.63 1,0.63, height 0.65
FP-F0603G-MFG [mm]
  rect 0.85x1.1 smd paste+0 mask+0: 1(-0.775,0) 2(0.775,0)
  silkscreen extent -0.85,0.92 0.85,0.93, body extent -1.3,-0.65 1.3,0.65, height 0.25
FP-HCJ0805-MFG [mm]
  rect 1.4x1.44 smd paste+0 mask+0: 1(-1.1,0) 2(1.1,0)
  silkscreen extent -0.03,-0.72 0.03,0.72, body extent -1.9,-0.82 1.9,0.82, height 0.25
FP-LQM21PN_CH-IPC_C [mm]
  rect 1.006x1.308 smd paste+0 mask+0: 1(-0.726,0) 2(0.726,0)
  silkscreen extent -1.23,-1.1 1.23,1.1, body extent -1.33,-0.8 1.33,0.8, height 0.25
FP-MCU0805-IPC_C [mm]
  rect 0.759x1.308 smd paste+0 mask+0: 1(-0.827,0) 2(0.827,0)
  silkscreen extent 0,-0.7 0,0.7, body extent -1.31,-0.8 1.31,0.8, height 0.25
FP-P6KE-MFG [mm]
  rect 1.6x1.6 hole 1.05 paste-2539.97 mask+0: 1(-6.638,0)
  round 1.6 hole 1.05 paste-2539.97 mask+0: 2(6.638,0)
  silkscreen extent -5.44,-1.8 5.44,1.8, body extent -7.54,-1.9 7.54,1.9, height 0.25
FP-RMCF0805-IPC_A [mm]
  rect 1.355x1.462 smd paste+0 mask+0: 1(-0.976,0) 2(0.976,0)
  silkscreen extent -1.65,-1.13 1.65,1.13, body extent -2.15,-1.23 2.15,1.23, height 0.25
FP-RMCF0805-IPC_B [mm]
  rect 1.155x1.362 smd paste+0 mask+0: 1(-0.876,0) 2(0.876,0)
  silkscreen extent -1.45,-1.08 1.45,1.08, body extent -1,-0.63 1,0.63, height 0.65
FP-RMCF0805-MFG [mm]
  rect 0.9x1.3 smd paste+0 mask+0: 1(-1.05,0) 2(1.05,0)
  silkscreen extent -0.23,-0.67 0.23,0.67, body extent -1.6,-0.77 1.6,0.77, height 0.25
FP-RNCP0805-IPC_C [mm]
  rect 1.105x1.308 smd paste+0 mask+0: 1(-0.676,0) 2(0.676,0)
  silkscreen extent -1.23,1.1 1.23,1.1, body extent -1.33,-0.8 1.33,0.8, height 0.25
FP-RT0805-MFG [mm]
  rect 0.9x1.2 smd paste+0 mask+0: 1(-1.05,0) 2(1.05,0)
  silkscreen extent -0.23,-0.67 0.23,0.67, body extent -1.6,-0.77 1.6,0.77, height 0.25
JST_S3B-XH-A [mm]
  rect 1.508x1.508 / inner round 1.508 / far side rect 1.508x1.508 hole 1: 1(-2.5,5.7)
  round 1.508 hole 1: 2(0,5.7) 3(2.5,5.7)
  silkscreen extent -5.6,-3.5 4.95,8, body extent -4.95,-3.5 4.95,8, height 6.1
JST_S4B-XH-A [mm]
  rect 1.508x1.508 / inner round 1.508 / far side rect 1.508x1.508 hole 1: 1(-3.75,5.7)
  round 1.508 hole 1: 2(-1.25,5.7) 3(1.25,5.7) 4(3.75,5.7)
  silkscreen extent -6.85,-3.5 6.2,8, body extent -6.2,-3.5 6.2,8, height 6.1
JST_S5B-XH-A [mm]
  rect 1.508x1.508 / inner round 1.508 / far side rect 1.508x1.508 hole 1: 1(-5,5.7)
  round 1.508 hole 1: 2(-2.5,5.7) 3(0,5.7) 4(2.5,5.7) 5(5,5.7)
  silkscreen extent -8.1,-3.5 7.45,8, body extent -7.45,-3.5 7.45,8, height 6.1
MH [mm]
  round 3 hole 3: 2(0,0)
MOLEX_2171830001 [mm]
  rect 0.298x0.9 smd mask-2539.97: A1(-2.75,8.15) A2(-2.25,8.15) A3(-1.75,8.15) A4(-1.25,8.15) A5(-0.75,8.15) A6(-0.25,8.15) A7(0.25,8.15) A8(0.75,8.15) A9(1.25,8.15) A10(1.75,8.15) A11(2.25,8.15) A12(2.75,8.15)
  round 0.59 hole 0.4 mask-2539.97: B1(2.8,6.94) B2(2.4,6.24) B3(1.6,6.24) B4(1.2,6.94) B5(0.8,6.24) B6(0.4,6.94) B7(-0.4,6.94) B8(-0.8,6.24) B9(-1.2,6.94) B10(-1.6,6.24) B11(-2.4,6.24) B12(-2.8,6.94)
  oval 0.9x1.5 hole 0.5 slot 1.1 at 90 deg mask+0.064: SH1(-4.49,1.95) SH2(4.572,2.032) SH3(-4.13,6.34) SH4(4.13,6.34)
  round 0.65 hole 0.65 unplated mask+0.064: ""(-3.6,7.59)
  Keep-Out Layer board cut-out: 3.75,7.265 3.45,7.265 3.433,7.265 3.416,7.267 3.399,7.269 3.382,7.272 3.366,7.276 3.35,7.281 3.334,7.287 3.318,7.293 3.302,7.3 3.288,7.309 3.273,7.317 3.259,7.327 3.245,7.337 3.233,7.348 3.22,7.36 3.208,7.373 3.197,7.385 3.187,7.399 3.177,7.413 3.169,7.428 3.16,7.442 3.153,7.458 3.147,7.474 3.141,7.49 3.136,7.506 3.132,7.522 3.129,7.539 3.127,7.556 3.125,7.573 3.125,7.59 3.125,7.607 3.127,7.624 3.129,7.641 3.132,7.658 3.136,7.674 3.141,7.69 3.147,7.706 3.153,7.722 3.16,7.738 3.169,7.752 3.177,7.767 3.187,7.781 3.197,7.795 3.208,7.807 3.22,7.82 3.233,7.832 3.245,7.843 3.259,7.853 3.273,7.863 3.288,7.871 3.302,7.88 3.318,7.887 3.334,7.893 3.35,7.899 3.366,7.904 3.382,7.908 3.399,7.911 3.416,7.913 3.433,7.915 3.45,7.915 3.75,7.915 3.767,7.915 3.784,7.913 3.801,7.911 3.818,7.908 3.834,7.904 3.85,7.899 3.866,7.893 3.882,7.887 3.898,7.88 3.913,7.871 3.927,7.863 3.941,7.853 3.955,7.843 3.967,7.832 3.98,7.82 3.992,7.807 4.003,7.795 4.013,7.781 4.023,7.767 4.031,7.752 4.04,7.738 4.047,7.722 4.053,7.706 4.059,7.69 4.064,7.674 4.068,7.658 4.071,7.641 4.073,7.624 4.075,7.607 4.075,7.59 4.075,7.573 4.073,7.556 4.071,7.539 4.068,7.522 4.064,7.506 4.059,7.49 4.053,7.474 4.047,7.458 4.04,7.442 4.031,7.428 4.023,7.413 4.013,7.399 4.003,7.385 3.992,7.373 3.98,7.36 3.967,7.348 3.955,7.337 3.941,7.327 3.927,7.317 3.913,7.309 3.898,7.3 3.882,7.293 3.866,7.287 3.85,7.281 3.834,7.276 3.818,7.272 3.801,7.269 3.784,7.267 3.767,7.265
  silkscreen extent -4.83,0 6.16,9.27, body extent -4.95,-0.62 4.9,9.25, height 3.27
NDK-NX3225GD-8MHZ-STD-CRA-3_V [mm] "SMD, 2-Leads, Body 3.2x2.5mm"
  rect 1.5x2.7 smd: 1(-0.95,0) 2(0.95,0)
  body extent -1.6,-1.25 1.6,1.25, height 1
QFP50P900X900X160-48N [mm]
  rrect25% 1.49x0.27 smd mask-2539.97: 1(-4.17,2.75) 2(-4.17,2.25) 3(-4.17,1.75) 4(-4.17,1.25) 5(-4.17,0.75) 6(-4.17,0.25) 7(-4.17,-0.25) 8(-4.17,-0.75) 9(-4.17,-1.25) 10(-4.17,-1.75) 11(-4.17,-2.25) 12(-4.17,-2.75)
  rrect25% 0.27x1.49 smd mask-2539.97: 13(-2.75,-4.17) 14(-2.25,-4.17) 15(-1.75,-4.17) 16(-1.25,-4.17) 17(-0.75,-4.17) 18(-0.25,-4.17) 19(0.25,-4.17) 20(0.75,-4.17) 21(1.25,-4.17) 22(1.75,-4.17) 23(2.25,-4.17) 24(2.75,-4.17)
  rrect25% 1.49x0.28 smd mask-2539.97: 25(4.17,-2.75) 26(4.17,-2.25) 27(4.17,-1.75) 28(4.17,-1.25) 29(4.17,-0.75) 30(4.17,-0.25) 31(4.17,0.25) 32(4.17,0.75) 33(4.17,1.25) 34(4.17,1.75) 35(4.17,2.25) 36(4.17,2.75)
  rrect25% 0.28x1.49 smd mask-2539.97: 37(2.75,4.17) 38(2.25,4.17) 39(1.75,4.17) 40(1.25,4.17) 41(0.75,4.17) 42(0.25,4.17) 43(-0.25,4.17) 44(-0.75,4.17) 45(-1.25,4.17) 46(-1.75,4.17) 47(-2.25,4.17) 48(-2.75,4.17)
  silkscreen extent -5.96,-3.55 3.55,3.55, body extent -4.54,-4.5 4.54,4.5, height 1.61
RESC0805(2012)_L [mm] "Chip Resistor, Body 2.0x1.3mm, IPC High Density"
  rect 0.85x1.3 smd: 1(-0.85,0) 2(0.85,0)
  silkscreen extent -0.05,-0.55 0.05,0.55, body extent -1.1,-0.67 1.1,0.68, height 0.7
RESC0805(2012)_M [mm] "Chip Resistor, Body 2.0x1.3mm, IPC Low Density"
  rect 1.25x1.5 smd: 1(-1.05,0) 2(1.05,0)
  silkscreen extent -0.05,-0.65 0.05,0.65, body extent -1.1,-0.67 1.1,0.67, height 0.7
RESC2013X60X35ML10T20 [mm] "Chip Resistor, 2-Leads, Body 2.00x1.25mm, IPC Low Density"
  rect 1.2x1.45 smd: 1(-1,0) 2(1,0)
  silkscreen extent -0.1,-0.63 0.1,0.63, body extent -1.05,-0.67 1.05,0.67, height 0.6
SOT230P700X180-4N [mm]
  rect 2.15x0.95 smd paste+0 mask+0.102: 1(-2.9,2.3) 2(-2.9,0) 3(-2.9,-2.3)
  rect 2.15x3.25 smd paste+0 mask+0.102: 4(2.9,0)
  silkscreen extent -4.7,-3.25 1.75,3.25, body extent -3.5,-3.25 3.5,3.25, height 1.8
TO92 [mil]
  oval 60x120 hole 32 mask+4.02: 1(-100,0) 2(0,75) 3(100,0)
  silkscreen extent -90,-45 80,110, body extent -108,-50 108,92, height 318
TO220BH [mil]
  oval 66x132 hole 44: D(0,-250) G(-100,-250) S(100,-250)
  silkscreen extent -205,-160 205,305, body extent -200,-300 200,300, height 190
TO254P1041X444X1930-3 [mm]
  rect 1.845x1.845 / inner round 1.845 / far side rect 1.845x1.845 hole 1.23: 1(-2.54,-0.81)
  round 1.845 hole 1.23: 2(0,-0.81) 3(2.54,-0.81)
  silkscreen extent -6.06,-2.22 5.21,2.22, body extent -5.21,-2.22 5.21,2.22, height 19.3
TO254P1054X469X1930-3 [mm]
  rect 1.85x1.85 / inner round 1.85 / far side rect 1.85x1.85 hole 1.23: 1(-2.54,-0.94)
  round 1.85 hole 1.23: 2(0,-0.94) 3(2.54,-0.94)
  silkscreen extent -5.27,-2.96 5.27,2.35, body extent -5.08,-1.71 5.08,2.73, height 15.01
TP [mm]
  round 2 smd: 1(0,0)
WL-TIRC_5mm [mm]
  round 1.5 hole 1: 1(-1.27,0) 2(1.27,0)
  silkscreen extent -3.02,-3.02 2.63,3.02, body extent -2.9,-2.9 2.5,2.9, height 6.2

## Part data
C1 C14 C15 C16 C17 C19 C20 C21 C22 C23 C24 C25 C26 C31 C32 C33 C34 C35 C36 C37 C38: library part CMP-2007-04702-1, Manufacturer="AVX Interconnect / Elco", Part Number=0805ZC106KAT2A
C2: library part CMP-07738-122049624-1, "08051C105K4T2A Cap Ceramic 1uF 100V X7R 10% Pad SMD 0805 125C Automotive T/R", Capacitance=1µF, Case/Package=0805, Dielectric=X7R, Max Operating Temperature=125°C, Min Operating Temperature=-55°C, Tolerance=10%, Voltage Rating=100V, Height=1.4mm, Lifecycle Status=Production, Material=Ceramic, NexarPartId=122049624, RoHS=Compliant, Schedule B=8532240020, Voltage Rating (DC)=100V
C3 C4: library part CMP-2007-00394-2, "CAP CER 0.047UF 50V X7R 0805", Capacitance="47,000 pF", Manufacturer=KEMET, Manufacturer Part Number=C0805C473K5RACAUTO, Package=C0805C-DN, Temperature="-55°C to +125°C", Temperature Characteristic=X7R, Temperature Coefficient=30ppm/°C, Temperature Range High=+125°C, Temperature Range Low=-55°C, Tolerance=0.1, Voltage Rating="50 V", Automotive=No, Category=Cap, ComponentLink2Description=Datasheet, ComponentLink2URL=https://content.kemet.com/datasheets/KEM_C1003_C0G_SMD.pdf, Device Class L1="Passive Components", Device Class L2=Capacitors, Device Class L3="Ceramic Capacitors", Digikey Description="CAP CER 0.047UF 50V X7R 0805", Height=0.88mm, Ipc Land Pattern Name=CAPC200125X78, Lead Free=Yes, Material=Ceramic, Mouser Description="Multilayer Ceramic Capacitors MLCC - SMD/SMT 0.047uF 50volts 10% X7R AUTO", Octopart=https://octopart.com/c0805c473k5racauto-kemet-12580596, RoHS=TRUE
C5: library part CMP-1036-04429-1, "CAP 100nF 100V ±10% 0805 (2012 Metric) Thickness 1.45mm SMD", Case-EIA=0805, Case-Metric=2012, Rated Voltage="100 V", Tolerance=Â±10%, Max Thickness="1.45 mm", Technology=SMT
C6 C7: library part CMP-2007-01759-1, Manufacturer=Vitramon, Part Number=VJ0805A151JXAMC
C8: library part CMP-2007-04651-1, Manufacturer="AVX Interconnect / Elco", Part Number=0805DD104KAT2A
C9 C10: library part CMP-03020-013264-1, "CAP CER 0.033UF 50V U2J 0805", Capacitance="33,000 pF", Manufacturer=KEMET, Package=C0805C-DN, Temperature="-55°C to +125°C", Temperature Characteristic=U2J, Temperature Coefficient=30ppm/°C, Temperature Range High=+125°C, Temperature Range Low=-55°C, Tolerance=0.05, Voltage Rating="50 V", Automotive=No, Category=Cap, ComponentLink2Description=Datasheet, ComponentLink2URL=https://content.kemet.com/datasheets/KEM_C1003_C0G_SMD.pdf, Device Class L1="Passive Components", Device Class L2=Capacitors, Device Class L3="Ceramic Capacitors", Digikey Description="CAP CER 0.033UF 50V U2J 0805", Height=0.88mm, Ipc Land Pattern Name=CAPC200125X78, Lead Free=Yes, Manufacturer Part Number=C0805C333J5JACTU, Material=Ceramic, Octopart=https://octopart.com/c0805c333j5jactu-kemet-74774612, RoHS=TRUE
C11: library part CMP-03422-000762-1, "CAP CER 1UF 25V X5R 0805", Capacitance="1 uF", Manufacturer=Yageo, Package=CC0805-0.85, Temperature="-30°C to +85°C", Temperature Characteristic=X5R, Temperature Range High=+85°C, Temperature Range Low=-30°C, Tolerance=0.2, Voltage Rating="25 V", Automotive=No, Category=Cap, ComponentLink2Description=Datasheet, ComponentLink2URL=http://www.yageo.com/documents/recent/UPY-GPHC_Y5V_6.3V-to-50V_8.pdf, Device Class L1="Passive Components", Device Class L2=Capacitors, Device Class L3="Ceramic Capacitors", Digikey Description="CAP CER 1UF 25V X5R 0805", Footprint Url=http://www.yageo.com/exep/pages/download/literatures/UPY-C_GEN_24.pdf, Height=0.95mm, Ipc Land Pattern Name=CAPC200125X85, Lead Free=Yes, Manufacturer Part Number=CC0805MKX5R8BB105, Material=Ceramic, Mouser Description="Cap Cer 1uf 25v X5r 0805", Octopart=https://octopart.com/cc0805mkx5r8bb105-yageo-81932645, RoHS=TRUE
C12 C39 C40 C41 C42 C43: library part CMP-2007-01676-1, Manufacturer=Vitramon, Part Number=VJ0805Y105KXQRW1BC
C13: library part CMP-2007-03688-1, Manufacturer=Kemet, Part Number=C0805C225M4PACTU
C18: library part CMP-2007-04832-1, Manufacturer="AVX Interconnect / Elco", Part Number=08052C101KAT2A
C27: library part CMP-2007-04132-1, Manufacturer="AVX Interconnect / Elco", Part Number=08051A150KAT2A
C28: library part CMP-2007-01784-1, Manufacturer=Vitramon, Part Number=VJ0805A330JXBAC
C29: library part CMP-1036-02840-1, "CAP 680pF 100V ±10% 0805 (2012 Metric) Thickness 1.45mm SMD", Case-EIA=0805, Case-Metric=2012, Rated Voltage="100 V", Tolerance=Â±10%, Max Thickness="1.45 mm", Technology=SMT
C30: library part CMP-2007-01890-1, Manufacturer=Vitramon, Part Number=VJ0805A182FXAMT
C44 C45 C46: library part CMP-2007-01044-1, Manufacturer=Kemet, Part Number=C0805C106K8RACTU
C47 C48: library part CMP-03020-010976-1, "C0805 10 pF X8R 30ppm/°C 5.00% 25 V", Capacitance="10 pF", Manufacturer=KEMET, Package=C0805C-DN, Temperature="-55°C to +125°C", Temperature Characteristic=X8R, Temperature Coefficient=30ppm/°C, Temperature Range High=+125°C, Temperature Range Low=-55°C, Tolerance=0.05, Voltage Rating="25 V", Automotive=No, Category=Cap, ComponentLink2Description=Datasheet, ComponentLink2URL=https://content.kemet.com/datasheets/KEM_C1003_C0G_SMD.pdf, Device Class L1="Passive Components", Device Class L2=Capacitors, Device Class L3="Ceramic Capacitors", Height=0.88mm, Ipc Land Pattern Name=CAPC200125X78, Lead Free=Yes, Manufacturer Part Number=C0805C100J3HACTU, Material=Ceramic, Octopart=https://octopart.com/c0805c100j3hactu-kemet-88696329, RoHS=TRUE
D1 D2 D3 D4 D5 D6 D7: library part CMP-08607-000072-1, "TVS DIODE 5.8V 10.5V DO204AC", Breakdown Voltage=6.45V, Clamping Voltage=10.5V, Manufacturer="Littelfuse Inc", Max Junction Temp=+175°C, Package=P6KE, Peak Pulse Current=58.1A, Peak Pulse Power=600W, Reverse Standoff Voltage=5.8V, Temperature="-55°C to +175°C", Temperature Range Low=-55°C, Automotive=No, Category=Diode, ComponentLink2Description=Datasheet, ComponentLink2URL=https://www.littelfuse.com/~/media/electronics/datasheets/tvs_diodes/littelfuse_tvs_diode_p6ke_datasheet.pdf.pdf, Device Class L1="Circuit Protection", Device Class L2="TVS Diodes", Device Class L3=unset, Digikey Description="TVS DIODE 5.8V 10.5V DO204AC", Direction=Unidirectional, Height=3.6mm, Ipc Land Pattern Name=DIOPA1328W105L760D360, Lead Free=Yes, Manufacturer Part Number=P6KE6.8A, Mouser Description="TVSS; Diode; For Data/Comm; Industrial Equip; 58.1A; Thru-Hole; Solder Term", Number Of Channels=1, Octopart=https://octopart.com/p6ke6.8a-littelfuse-20808, RoHS=TRUE, Temperature Range High=+175°C
D8 D9 D10: library part CMP-03913-110288041-2, "Led, 5Mm, 940Nm, 30Mw/Sr, Th Rohs Compliant: Yes", Forward Current=1A, Forward Voltage=1.3V, Max Operating Temperature=85°C, Max Reverse Voltage (DC)=5V, Min Operating Temperature=-40°C, Peak Wavelength=940nm, RoHS=Compliant, Viewing Angle=30°
F1: library part CMP-04585-000004-1, "FUSE BOARD MOUNT 50MA 32VDC 0603", Fuse Current=0.125A, Fuse Voltage Drop=250mV, Manufacturer="AVX Corporation", Package=F0603G, Resistance=3.4Ω, Temperature="-55°C to +125°C", Temperature Range High=+125°C, Temperature Range Low=-55°C, Voltage Rating=32V, Automotive=No, Category=Fuse, ComponentLink2Description=Datasheet, ComponentLink2URL=http://datasheets.avx.com/AccuGuardLC_0603.pdf, Device Class L1="Circuit Protection", Device Class L2=Fuses, Device Class L3=unset, Digikey Description="FUSE BOARD MOUNT 50MA 32VDC 0603", Fuse Blow Speed=Fast, Fuse I2T=0.000002A2Sec, Height=0.71mm, Lead Free=Yes, Manufacturer Part Number=F0603G0R05FNTR, Mouser Description="Fuse Chip 0.05A 32V Fast 2-Pin Solder Pad Surface Mount T/R", Octopart=https://octopart.com/f0603g0r05fntr-avx-21046321, RoHS=TRUE
J1 J2 J4: Package=None, Availability=Unavailable, Price=None
  J1: MF="{'manufacturer': u'Molex'}", MP=2171830001
  J2: MP=S3B-XH-A
  J4: MP=S4B-XH-A
J3: "Socket, DC supply, male, PIN: 2", Package=Package, Check_prices=https://www.snapeda.com/parts/XT60PW-M/AMASS/view-part/?ref=eda, MF=AMASS, MP=XT60PW-M, SnapEDA_Link=https://www.snapeda.com/parts/XT60PW-M/AMASS/view-part/?ref=snap
J5: "Connector Header Through Hole, Right Angle 5 position 0.098 (2.50mm)", Package=None, Check_prices=https://www.snapeda.com/parts/S5B-XH-A/JST+Sales+America+Inc./view-part/?ref=eda, MF="JST Sales", MP=S5B-XH-A, SnapEDA_Link=https://www.snapeda.com/parts/S5B-XH-A/JST+Sales+America+Inc./view-part/?ref=snap
J6: library part CMP-17439-000699-1, "CONN HEADER EH TOP 4POS 2.5MM", Case/Package=Radial, Lead Free="Lead Free", Number of Positions=4, Pitch=2.5mm, Termination=Crimp
L1: library part CMP-06042-016495-1, "Multilayer Type Inductor for Power Lines, 2012, 2.2μH, 20%, 0.25Ω, 1.3A", RoHS Compliant=Yes
Q1 Q2 Q3 Q4 Q10: "P-Channel 100 V 23A (Tc) 3.1W (Ta), 110W (Tc)", Package="TO-220 Infineon", Availability="In Stock", Check_prices=https://www.snapeda.com/parts/IRF9540N/Infineon+Technologies/view-part/?ref=eda, MF="Infineon Technologies", MP=IRF9540N, Price=None, Purchase-URL=https://pricing.snapeda.com/search/part/IRF9540N/?ref=eda, SnapEDA_Link=https://www.snapeda.com/parts/IRF9540N/Infineon+Technologies/view-part/?ref=snap
Q5 Q6 Q8 Q9: "N-Channel 55 V 47A (Tc) 3.8W (Ta), 110W (Tc) Surface Mount D2PAK", Package="TO-220-3 Infineon / IR", Availability="Not in stock", Check_prices=https://www.snapeda.com/parts/IRLZ44N/Infineon/view-part/?ref=eda, MF="Infineon / IR", MP=IRLZ44N, Price=None, SnapEDA_Link=https://www.snapeda.com/parts/IRLZ44N/Infineon/view-part/?ref=snap
Q7: "P-Channel 55 V 74A (Tc) 200W (Tc) Through Hole TO-220AB", Package="TO-263-3 Infineon / IR", Check_prices=https://www.snapeda.com/parts/IRF4905/Infineon/view-part/?ref=eda, MF="Infineon / IR", MP=IRF4905, SnapEDA_Link=https://www.snapeda.com/parts/IRF4905/Infineon/view-part/?ref=snap
R1 R3 R8 R9 R11 R12 R14 R16: library part CMP-03211-002989-1, "CRGCQ 0805 10K 5%", Ambient Temperature Range High=+70°C, Manufacturer="TE Connectivity", Package=CRGCQ0805, Power Rating=0.125W, Resistance=10KΩ, Temperature="-55°C to +155°C", Temperature Coefficient=±100ppm/°C, Temperature Range High=+155°C, Temperature Range Low=-55°C, Tolerance=0.05, Voltage Rating=150V, Automotive=Yes, Automotive Grade="Grade 914", Category=Res, ComponentLink2Description=Datasheet, ComponentLink2URL=https://www.te.com/commerce/DocumentDelivery/DDEController?Action=showdoc&DocId=Data+Sheet%7F1773204-3%7F1%7Fpdf%7FEnglish%7FENG_DS_1773204-3_1.pdf%7F4-2176341-923, Composition="Thick Film", Device Class L1="Passive Components", Device Class L2=Resistors, Device Class L3="Chip SMD Resistors", Digikey Description="CRGCQ 0805 10K 5%", Height=0.65mm, Ipc Land Pattern Name=RESC200125X55, Lead Free=Yes, Manufacturer Part Number=CRGCQ0805J10K, Mouser Description="Res Thick Film 0805 10K Ohm 5% 0.125W(1/8W) ±100ppm/C Pad SMD Automotive T/R", Octopart=https://octopart.com/crgcq0805j10k-te+connectivity-91018201, RoHS=TRUE, Series=CRGCQ
R2 R4 R31 R47 R49 R50 R51: library part CMP-26527-000104-1, "RES 0 OHM JUMPER 1/2W 0805", Case Code (Imperial)=0805, Case Code (Metric)=2012, Max Operating Temperature=155°C, Min Operating Temperature=-55°C, Package Quantity=1, Resistance=0mR, Case/Package=0805, Height=0.026inch, Lead Free="Lead Free", Length=0.079inch, Mount="Surface Mount", Number of Terminations=2, Packaging="Tape and Reel", Radiation Hardening=No, RoHS Compliant=Yes, Termination=Wraparound, Width=0.049inch
R5 R7: library part CMP-2001-04477-2, "RES SMD 5.1K OHM 5% 1/8W 0805", Manufacturer=Yageo, Package=AC0805, Power Rating=1/8W, Resistance=5.1KΩ, Temperature="-55°C to +155°C", Temperature Range High=+155°C, Temperature Range Low=-55°C, Tolerance=0.05, Voltage Rating=150V, Automotive=Yes, Automotive Grade="Grade 0", Category=Res, ComponentLink2Description=Datasheet, ComponentLink2URL=http://www.yageo.com/documents/recent/PYu-AC_51_RoHS_L_6.pdf, Composition="Thick Film", Device Class L1="Passive Components", Device Class L2=Resistors, Device Class L3="Chip SMD Resistors", Digikey Description="RES SMD 5.1K OHM 5% 1/8W 0805", Footprint Url=http://www.yageo.com/exep/pages/download/literatures/PYu-R_Mount_10.pdf, Height=0.6mm, Ipc Land Pattern Name=RESC200125X50, Lead Free=Yes, Manufacturer Part Number=AC0805JR-075K1L, Mouser Description="Thick Film Resistors - SMD 5.1K ohm 5% 1/8W", Octopart=https://octopart.com/ac0805jr-075k1l-yageo-21711115, RoHS=TRUE, Series=AC
R6 R10 R13 R15: library part CMP-26527-004456-1, "47Ω ±5% 0.125W 0805 Thick Film Chip Resistor AEC-Q200 compliant", Case Code (Imperial)=0805, Case Code (Metric)=2012, Max Operating Temperature=155°C, Max Power Dissipation=125mW, Min Operating Temperature=-55°C, Package Quantity=10000, Resistance=47R, Resistor Type="Thick Film", Temperature Coefficient=200ppm/°C, Tolerance=5%, Case/Package=0805, Contact Plating=Tin, Features="Automotive AEC-Q200", Height=0.026inch, Length=0.079inch, Mount="Surface Mount", Number of Terminations=2, Packaging="Tape and Reel", Radiation Hardening=No, RoHS Compliant=Yes, Series=RMCF, Width=0.049inch
R17 R18 R19 R20: library part CMP-02407-002418-1, "RES Thick Film, 4.99Ω, 0.5%, 0.5W, 100ppm/°C, 0805"
R21 R22: library part CMP-26527-001729-1, "10Ω ±1% 0.25W 0805 High Power Anti-Sulfur Thin Film Chip Resistor", Case Code (Imperial)=0805, Case Code (Metric)=2012, Max Operating Temperature=155°C, Max Power Dissipation=250mW, Min Operating Temperature=-55°C, Resistance=10R, Resistor Type="Thin Film", Temperature Coefficient=100ppm/°C, Tolerance=1%, Case/Package=0805, Features="Moisture Resistant", Height=0.024inch, Length=0.079inch, Mount="Surface Mount", Number of Terminations=2, Packaging="Tape and Reel", RoHS Compliant=Yes, Series=RNCP, Width=0.049inch
R23 R24: library part CMP-26527-004108-1, "10Ω ±1% 0.125W 0805 Thick Film Chip Resistor AEC-Q200 compliant", Case/Package=0805, Max Operating Temperature=155°C, Max Power Dissipation=125mW, Min Operating Temperature=-55°C, Resistance=10R, Resistor Type="Thick Film", Temperature Coefficient=100ppm/°C, Tolerance=1%, Contact Plating=Tin, Features="Automotive AEC-Q200", Height=0.026inch, Length=0.079inch, Mount="Surface Mount", Number of Terminations=2, Packaging="Tape and Reel", Radiation Hardening=No, RoHS Compliant=Yes, Series=RMCF, Width=0.049inch
R25 R29 R30 R32 R33 R34 R35 R58 R59 R60 R61: library part CMP-1013-00098-1, "10K 0.125W 5% 0805 (2012 Metric)  SMD", Case-EIA=0805, Case-Metric=2012, Power="0.125 W", Tolerance="5 %", Technology=SMT
R26: library part CMP-02407-010674-1, "RES Thick Film, 402kΩ, 1%, 0.125W, 100ppm/°C, 0805", Case/Package=0805, Max Operating Temperature=155°C, Max Power Dissipation=125mW, Min Operating Temperature=-55°C, Package Quantity=20000, Resistance=402kR, Temperature Coefficient=100ppm/°C, Tolerance=1%, Composition="Thick Film", Features="Automotive AEC-Q200", Height=0.02inch, Lead Free="Lead Free", Length=0.079inch, Number of Terminations=2, Packaging="Tape and Reel", Width=0.049inch
R27: library part CMP-2001-00916-1, Manufacturer=Yageo, Part Number=RC0805FR-07137KL
R28: library part CMP-08839-028060-1, "40.2kΩ ±1% 0.4W 0805 Anti-Surge Chip Resistor AEC-Q200", Case/Package=0805, Max Operating Temperature=155°C, Max Power Dissipation=400mW, Min Operating Temperature=-55°C, Package Quantity=5000, Resistance=40.2kR, Resistor Type="Thick Film", Temperature Coefficient=100ppm/°C, Tolerance=1%, Features="Automotive AEC-Q200", Height=0.026inch, Length=0.079inch, Number of Terminations=2, Packaging="Tape and Reel", RoHS Compliant=Yes, Series=ESR10, Width=0.049inch
R36 R37 R40: library part CMP-1013-00593-1, "5K36 0.125W 1% 0805 (2012 Metric)  SMD", Case-EIA=0805, Case-Metric=2012, Power="0.125 W", Tolerance="1 %", Technology=SMT
R38: library part CMP-03412-012413-1, "RES 357K OHM 1/8W .1% SMD 0805", Manufacturer=Yageo, Manufacturer Part Number=RT0805BRD07357KL, Package=RT0805, Power Rating=0.125W, Resistance=357KΩ, Temperature="-55°C to +155°C", Temperature Coefficient="25 ppm/°C", Temperature Range High=+155°C, Temperature Range Low=-55°C, Tolerance=0.0025, Voltage Rating=150V, Automotive=No, Category=Res, ComponentLink2Description=Datasheet, ComponentLink2URL=http://www.yageo.com/documents/recent/PYu-RT_1-to-0.01_RoHS_L_9.pdf, Composition="Thin Film", Device Class L1="Passive Components", Device Class L2=Resistors, Device Class L3="Chip SMD Resistors", Digikey Description="RES 357K OHM 1/8W .1% SMD 0805", Footprint Url=http://www.yageo.com/exep/pages/download/literatures/PYu-R_Mount_10.pdf, Height=0.6mm, Ipc Land Pattern Name=RESC200125X50, Lead Free=Yes, Mouser Description="Thin Film Resistors - SMD 1/8W 357K ohm .1% 25ppm", Octopart=https://octopart.com/rt0805brd07357kl-yageo-1483813, RoHS=TRUE, Series=RT
R39 R42 R43 R44: library part CMP-26527-005543-1, "1.2kΩ ±5% 0.125W 0805 Thick Film Chip Resistor AEC-Q200 compliant", Case/Package=0805, Max Operating Temperature=155°C, Max Power Dissipation=125mW, Min Operating Temperature=-55°C, Resistance=1.2kR, Resistor Type="Thick Film", Temperature Coefficient=200ppm/°C, Tolerance=5%, Contact Plating=Tin, Features="Automotive AEC-Q200", Height=0.026inch, Length=0.079inch, Mount="Surface Mount", Number of Terminations=2, Packaging="Tape and Reel", Radiation Hardening=No, RoHS Compliant=Yes, Series=RMCF, Width=0.049inch
R41 R45: library part CMP-1013-00087-1, "3K6 0.125W 5% 0805 (2012 Metric)  SMD", Case-EIA=0805, Case-Metric=2012, Power="0.125 W", Tolerance="5 %", Technology=SMT
R46 R48 R53: library part CMP-02407-000241-1, "RES 1.05K OHM 0.5% 1/5W 0805", Case Code (Imperial)=0805, Case Code (Metric)=2012, Max Operating Temperature=155°C, Min Operating Temperature=-55°C, Power Rating=200mW, Resistance=10kR, Tolerance=0.1%, Voltage Rating=150V, Case/Package=0805, Composition="Thin Film", Height=0.52mm, Length=2mm, Packaging="Tape and Reel", Weight=0.000162oz, Width=1.25mm
R52 R54: library part CMP-26527-001038-1, "12.4kΩ ±1% 0.25W 0805 High Power Anti-Sulfur Thin Film Chip Resistor", Case Code (Imperial)=0805, Case Code (Metric)=2012, Max Operating Temperature=155°C, Max Power Dissipation=250mW, Min Operating Temperature=-55°C, Resistance=12.4kR, Resistor Type="Thin Film", Temperature Coefficient=100ppm/°C, Tolerance=1%, Case/Package=0805, Features="Moisture Resistant", Height=0.024inch, Length=0.079inch, Mount="Surface Mount", Number of Terminations=2, Packaging="Tape and Reel", RoHS Compliant=Yes, Series=RNCP, Width=0.049inch
R55 R56 R57: library part CMP-2001-04488-2, "RES SMD 220 OHM 1% 1/8W 0805", Manufacturer=Yageo, Package=AC0805, Power Rating=1/8W, Resistance=220Ω, Temperature="-55°C to +155°C", Temperature Range High=+155°C, Temperature Range Low=-55°C, Tolerance=0.01, Voltage Rating=150V, Automotive=Yes, Automotive Grade="Grade 0", Category=Res, ComponentLink2Description=Datasheet, ComponentLink2URL=http://www.yageo.com/documents/recent/PYu-AC_51_RoHS_L_6.pdf, Composition="Thick Film", Device Class L1="Passive Components", Device Class L2=Resistors, Device Class L3="Chip SMD Resistors", Digikey Description="RES SMD 220 OHM 1% 1/8W 0805", Footprint Url=http://www.yageo.com/exep/pages/download/literatures/PYu-R_Mount_10.pdf, Height=0.6mm, Ipc Land Pattern Name=RESC200125X50, Lead Free=Yes, Manufacturer Part Number=AC0805FR-07220RL, Mouser Description="Thick Film Resistors - SMD 1/8W 220ohm 1% AEC-Q200", Octopart=https://octopart.com/ac0805fr-07220rl-yageo-26041145, RoHS=TRUE, Series=AC
T1 T2 T3 T4: "N-Channel 60 V 200mA (Ta) 400mW (Ta) Through Hole TO-92-3", Package="E-PKG AXIAL-LEADED-2 ON Semiconductor", Check_prices=https://www.snapeda.com/parts/2N7000/Onsemi/view-part/?ref=eda, MF=onsemi, MP=2N7000, SnapEDA_Link=https://www.snapeda.com/parts/2N7000/Onsemi/view-part/?ref=snap
U1: "MCU 32-bit ARM Cortex M0+ RISC 128KB Flash 1.8V/2.5V/3.3V 48-Pin LQFP Tray", Ambient Temperature Range High=85°C, Case/Package=LFQFP, Clock Frequency=48MHz, Frequency=64MHz, Manufacturer=STMicroelectronics, Manufacturer Part Number=STM32G071CBT6, Max Junction Temperature (Tj)=105°C, Max Supply Current=7mA, Max Supply Voltage=3.6V, Min Operating Temperature=-40°C, Min Supply Voltage=1.7V, Operating Supply Voltage=1.8V, Package="WQFN-32 Texas Instruments", Supplier Part Number=84AC2899, ADC Channels (Resolution)="14-Ch 12-Bit", Category=Microcontrollers, Check_prices=https://www.snapeda.com/parts/BQ25703ARSNR/Texas+Instruments/view-part/?ref=eda, China RoHS=Compliant, ComponentLink1Description=https://datasheet.octopart.com:443/STM32G071CBT6-STMicroelectronics-datasheet-159144893.pdf?src-supplier=IHS, ComponentLink1URL=https://datasheet.octopart.com:443/STM32G071CBT6-STMicroelectronics-datasheet-159144893.pdf?src-supplier=IHS, ComponentLink2Description=https://datasheet.octopart.com:443/STM32G071CBT6-STMicroelectronics-datasheet-132344621.pdf?src-supplier=ODG+(Origin+Data+Global), ComponentLink2URL=https://datasheet.octopart.com:443/STM32G071CBT6-STMicroelectronics-datasheet-132344621.pdf?src-supplier=ODG+(Origin+Data+Global), ComponentLink3Description=https://datasheet.octopart.com:443/STM32G071CBT6-STMicroelectronics-datasheet-130125765.pdf?src-supplier=element14+APAC, ComponentLink3URL=https://datasheet.octopart.com:443/STM32G071CBT6-STMicroelectronics-datasheet-130125765.pdf?src-supplier=element14+APAC, Core Architecture="ARM Cortex-M0+", Country of Origin="Mainland China", DAC Channels (Resolution)="2-Ch 12-Bit", Data Bus Width=32b, EEPROM Memory Size=0B, Export Control Classification Number (ECCN) Code=3A991.A.2, Flash Memory Size=128kB, Harmonized Tariff Schedule (HTS) Code=8542.31.00.25, Height=1.6mm, Height - Seated (Max)=1.6mm, Interface=I2S, Introduction Date=2019-03-07, Length=7mm, Lifecycle Status=Production, Max Operating Temperature=85°C, Memory Format=FLASH, Memory Size=128kB, MF="Texas Instruments", MP=BQ25703ARSNR, Number of A/D Converters=1, Number of ADC Channels=17, Number Of Channels=14, Number of D/A Converters=2, Number of I2C Channels=2, Number of I/Os=5, Number of Interrupts=44, Number of SPI Channels=2, Number of Terminals=48, Number of Timers/Counters=12, Number of UART Channels=0, Number of USART Channels=4, Number of USB Channels=2, Peripherals="POR, PWM, WDT", Pricing="1=3.97, 10=3.29, 25=3.08, 50=2.97, 100=2.86, 250=2.76, 500=2.69 (USD)", RAM Size=36kB, REACH SVHC=Yes, RoHS=Compliant, Schedule B="8542310000, 8542310000|8542310000, 8542310000|8542310000|8542310000|8542310000|8542310000", SnapEDA_Link=https://www.snapeda.com/parts/BQ25703ARSNR/Texas+Instruments/view-part/?ref=snap, Stock=1757, Supplier=Avnet, Terminal Pitch=500µm, Width=7mm